# EAGLE board LSM6DS3_Breakout_Panel_v10 (EAGLE 7.3.0), part 1 of 3
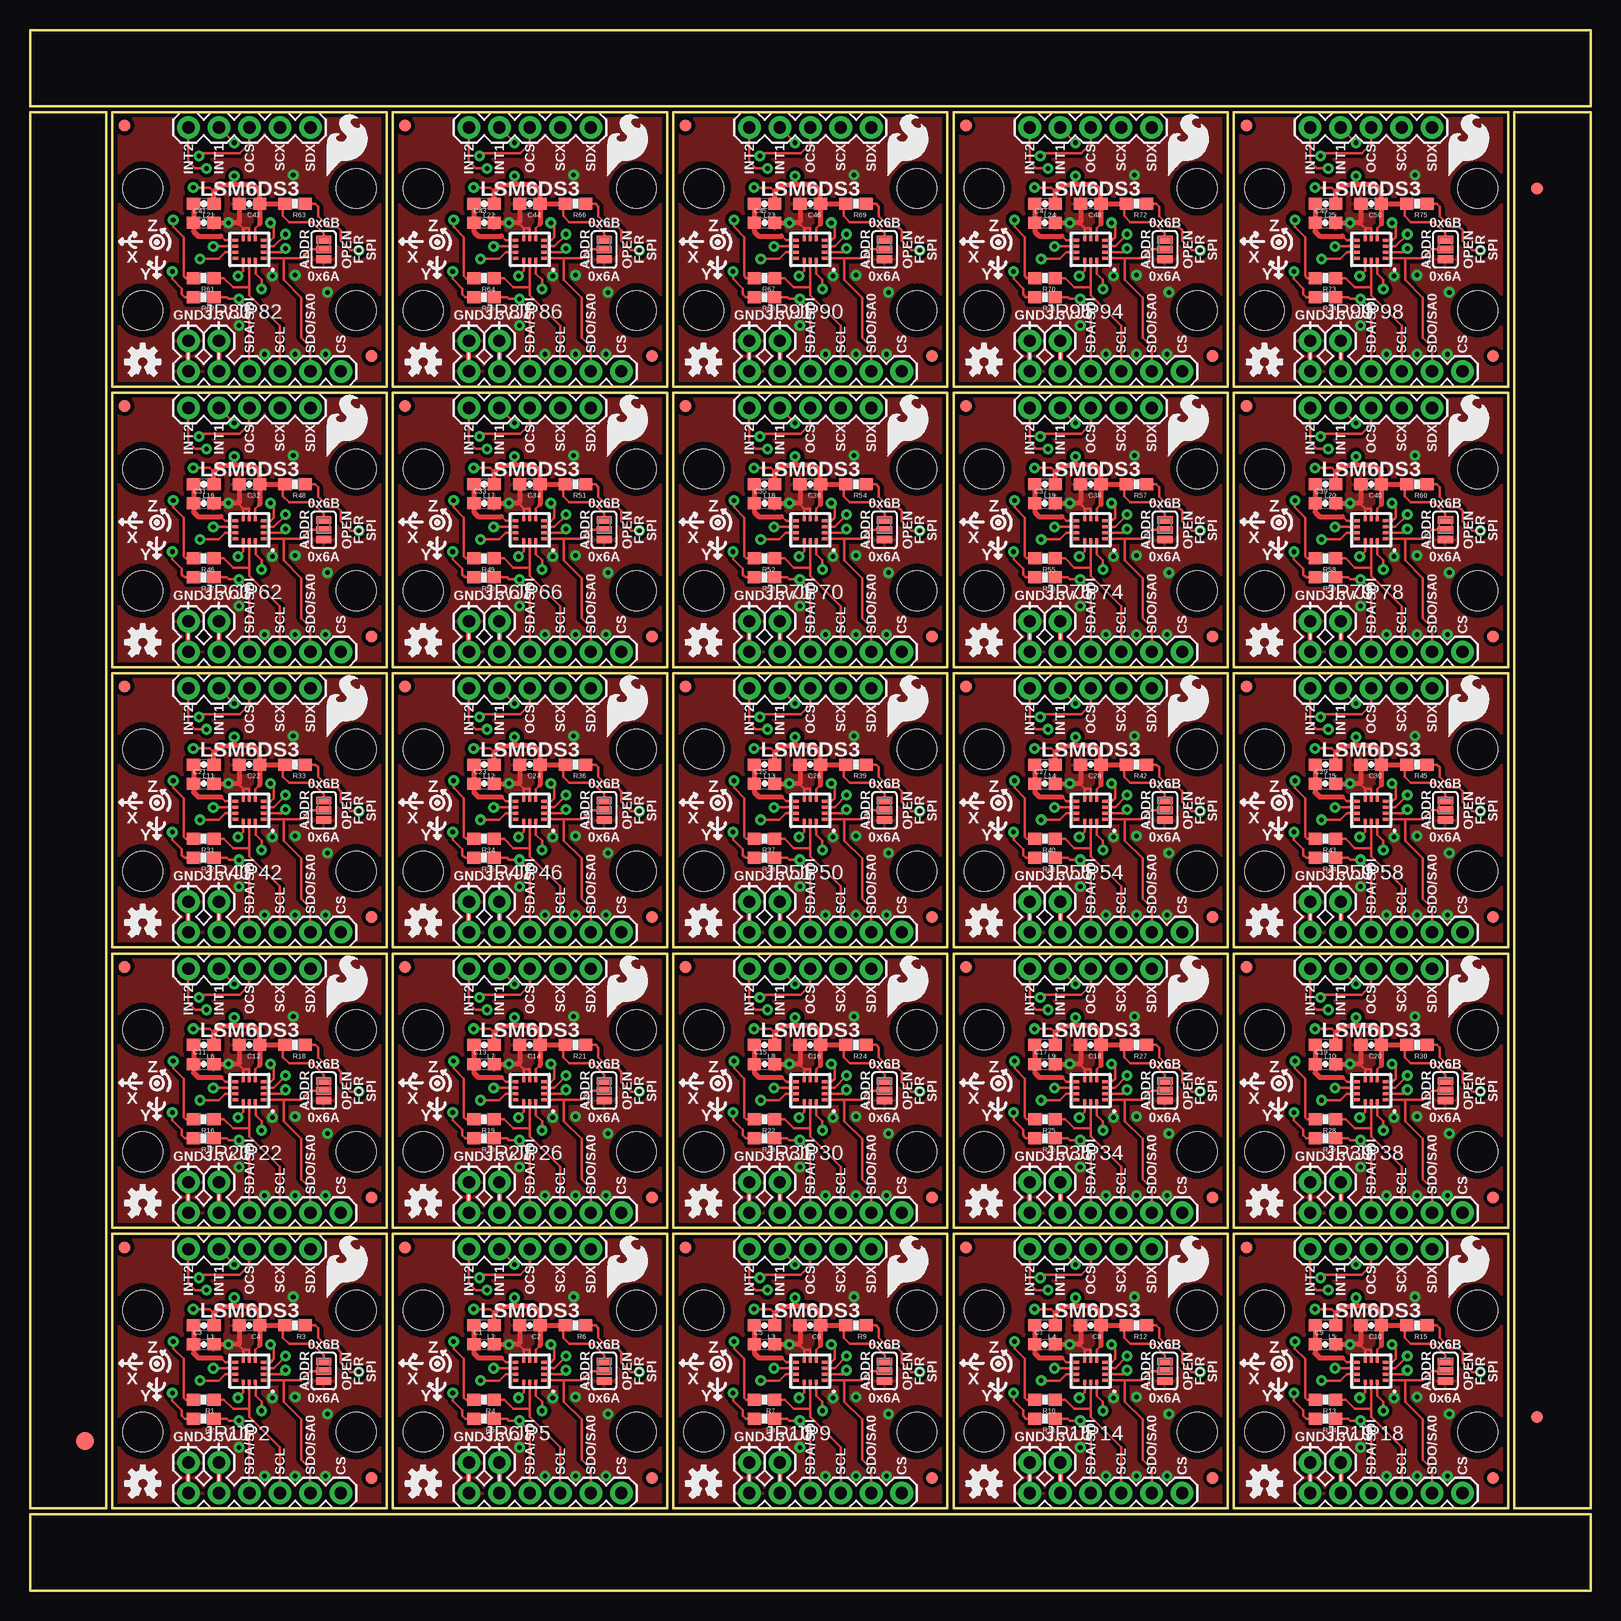
[diagram p0: board, top side]
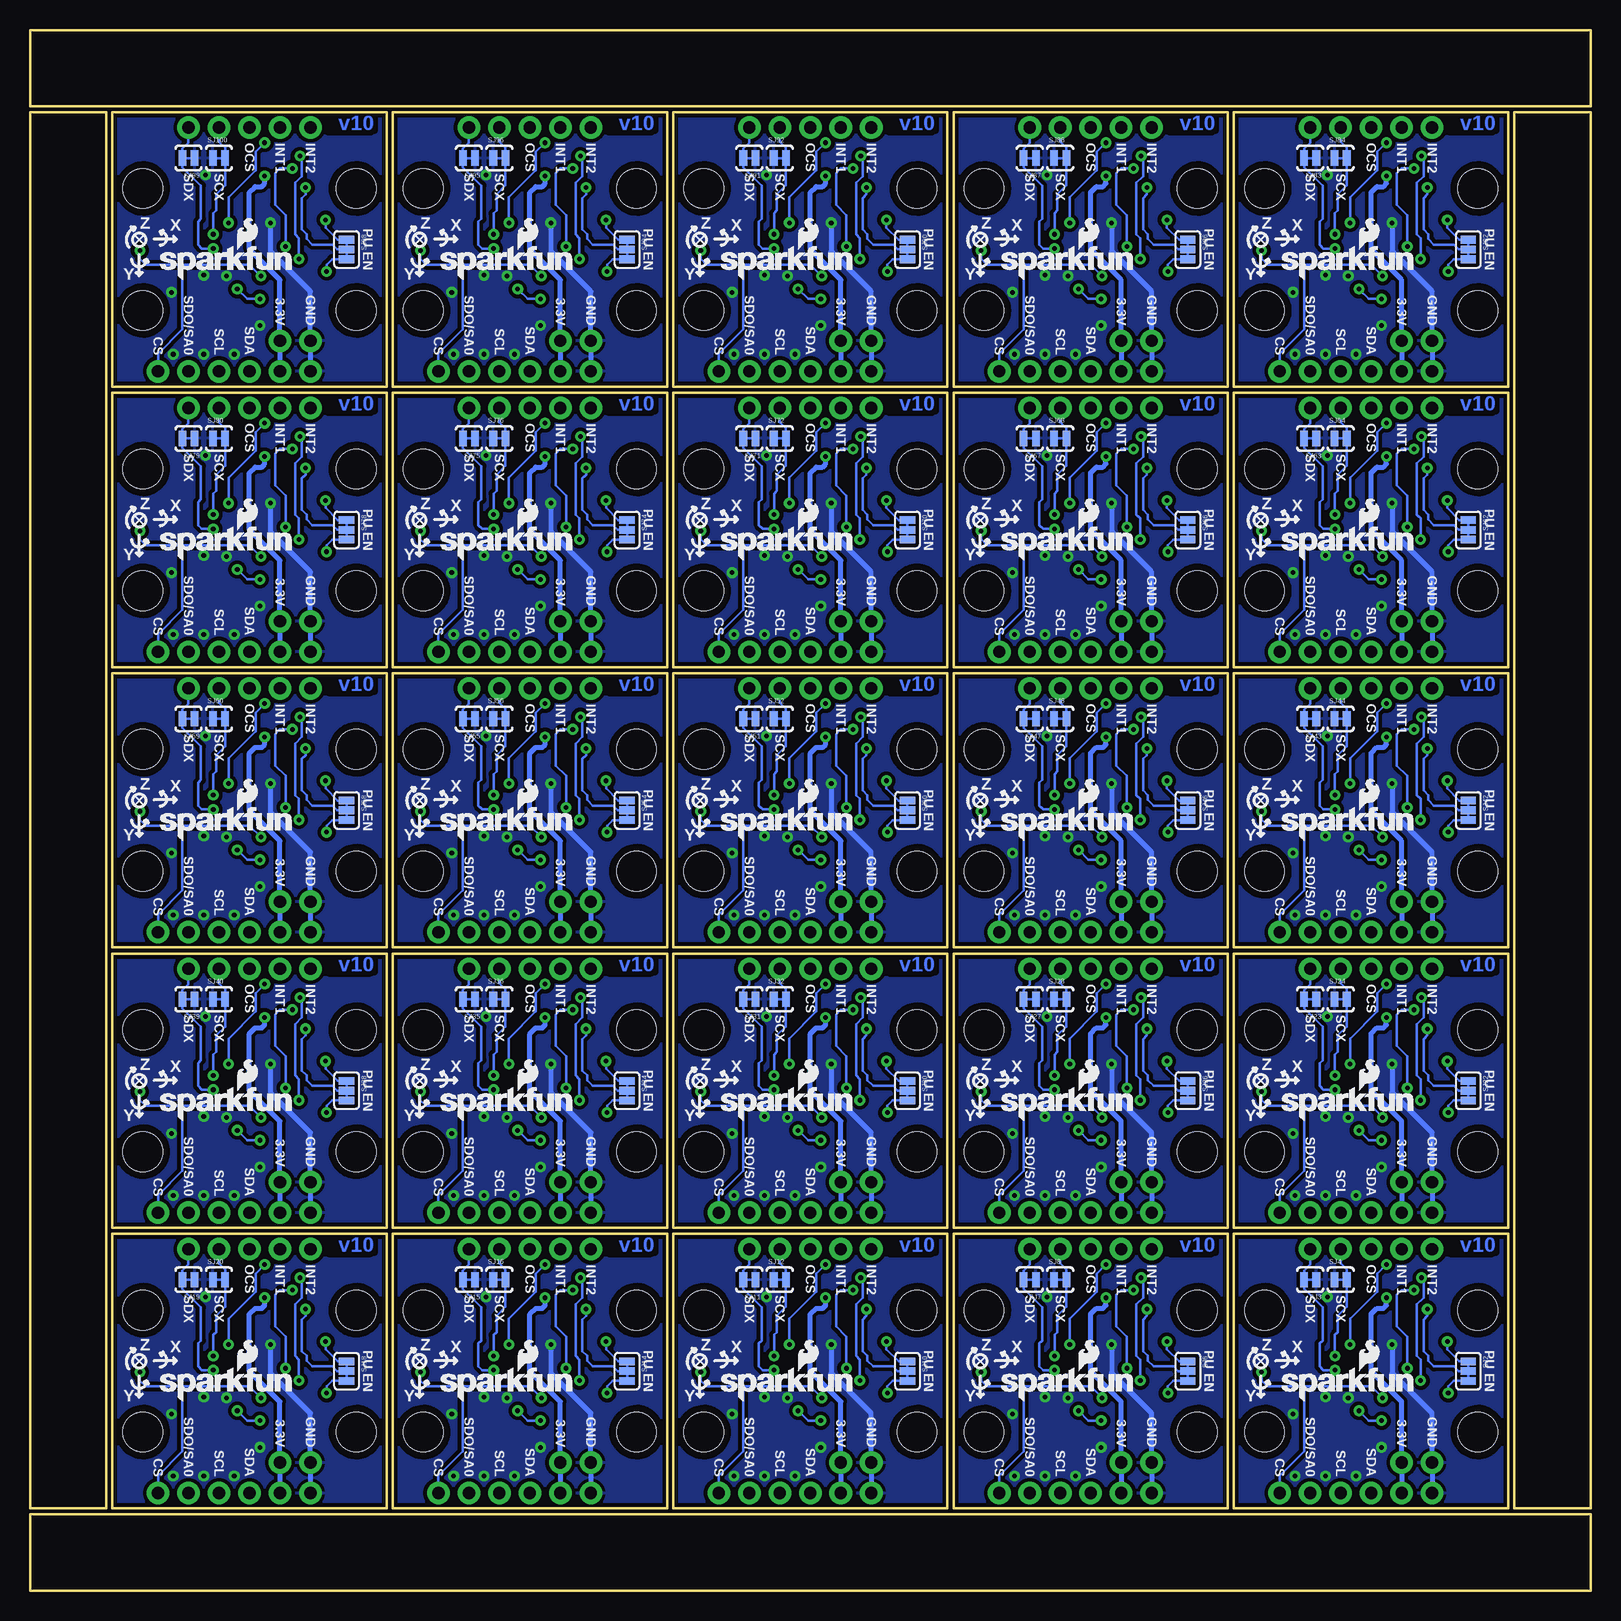
[diagram p1: board, bottom side, seen from below]

Size 130.05 x 130.05 mm. Coordinates in mm from the lower left corner, seen from the top.
Outline: 29.72,29.72 6.86,29.72 6.86,6.86 29.72,6.86 29.72,29.72
Outline: 53.09,29.72 30.23,29.72 30.23,6.86 53.09,6.86 53.09,29.72
Outline: 76.45,29.72 53.59,29.72 53.59,6.86 76.45,6.86 76.45,29.72
Outline: 99.82,29.72 76.96,29.72 76.96,6.86 99.82,6.86 99.82,29.72
Outline: 123.19,29.72 100.33,29.72 100.33,6.86 123.19,6.86 123.19,29.72
Outline: 29.72,53.09 6.86,53.09 6.86,30.23 29.72,30.23 29.72,53.09
Outline: 53.09,53.09 30.23,53.09 30.23,30.23 53.09,30.23 53.09,53.09
Outline: 76.45,53.09 53.59,53.09 53.59,30.23 76.45,30.23 76.45,53.09
Outline: 99.82,53.09 76.96,53.09 76.96,30.23 99.82,30.23 99.82,53.09
Outline: 123.19,53.09 100.33,53.09 100.33,30.23 123.19,30.23 123.19,53.09
Outline: 29.72,76.45 6.86,76.45 6.86,53.59 29.72,53.59 29.72,76.45
Outline: 53.09,76.45 30.23,76.45 30.23,53.59 53.09,53.59 53.09,76.45
Outline: 76.45,76.45 53.59,76.45 53.59,53.59 76.45,53.59 76.45,76.45
Outline: 99.82,76.45 76.96,76.45 76.96,53.59 99.82,53.59 99.82,76.45
Outline: 123.19,76.45 100.33,76.45 100.33,53.59 123.19,53.59 123.19,76.45
Outline: 29.72,99.82 6.86,99.82 6.86,76.96 29.72,76.96 29.72,99.82
Outline: 53.09,99.82 30.23,99.82 30.23,76.96 53.09,76.96 53.09,99.82
Outline: 76.45,99.82 53.59,99.82 53.59,76.96 76.45,76.96 76.45,99.82
Outline: 99.82,99.82 76.96,99.82 76.96,76.96 99.82,76.96 99.82,99.82
Outline: 123.19,99.82 100.33,99.82 100.33,76.96 123.19,76.96 123.19,99.82
Outline: 29.72,123.19 6.86,123.19 6.86,100.33 29.72,100.33 29.72,123.19
Outline: 53.09,123.19 30.23,123.19 30.23,100.33 53.09,100.33 53.09,123.19
Outline: 76.45,123.19 53.59,123.19 53.59,100.33 76.45,100.33 76.45,123.19
Outline: 99.82,123.19 76.96,123.19 76.96,100.33 99.82,100.33 99.82,123.19
Outline: 123.19,123.19 100.33,123.19 100.33,100.33 123.19,100.33 123.19,123.19
Outline: 6.35,6.86 6.35,123.19 0,123.19 0,6.86 6.35,6.86
Outline: 0,0 130.05,0 130.05,6.35 0,6.35 0,0
Outline: 0,123.7 130.05,123.7 130.05,130.05 0,130.05 0,123.7
Outline: 123.7,123.19 123.7,6.86 130.05,6.86 130.05,123.19 123.7,123.19
Copper layers (1*16): Top 0.035mm / dielectric 1.5mm / Bottom 0.035mm
Design rules "SparkFun-2-layer": minimum track width 7mil, minimum drill 15mil, track to track 8mil, track to pad 8mil, pad to pad 8mil, via to via 8mil, smd to smd 8mil, copper to edge 8mil, drill to drill 8mil, minimum pad ring 12mil, minimum via ring 10mil, stop-mask expansion 4mil, vias tented up to drill 20mil, thermal gap 10mil
bRestrict: 100 lines

## Footprints (pad centres in the part's own frame; a part is rotated, then mirrored left to right if it is on the bottom)
0603-CAP = smd 1.1 x 1: 1 -0.85,0; 2 0.85,0
FIDUCIAL-1.5X3 = smd 1.5 x 1.5: 1 0,0
FIDUCIAL-1X2 = smd 1 x 1: 1 0,0
1X06_NO_SILK_YES_STOP = drill 1.016 pad 1.88: 1 0,0; 2 2.54,0; 3 5.08,0; 4 7.62,0; 5 10.16,0; 6 12.7,0
1X01_NO_SILK = drill 1.016 pad 1.88: 1 0,0
1X05 = drill 1.016 pad 1.88: 1 0,0; 2 2.54,0; 3 5.08,0; 4 7.62,0; 5 10.16,0
0603 = smd 1.1 x 1: 1 -0.85,0; 2 0.85,0
0603-RES = smd 1.1 x 1: 1 -0.85,0; 2 0.85,0
PAD-JUMPER-3-2OF3_NC_BY_PASTE_YES_SILK_FULL_BOX = smd 0.635 x 1.27: 1 -0.813,0; 2 0,0; 3 0.813,0
PAD-JUMPER-3-3OF3_NC_BY_TRACE_YES_SILK_FULL_BOX = smd 0.635 x 1.27: 1 -0.813,0; 2 0,0; 3 0.813,0
PAD-JUMPER-2-NC_BY_TRACE_YES_SILK = smd 0.635 x 1.27: 1 -0.508,0; 2 0.508,0
STAND-OFF = hole 3.302: 0,0
LGA14L_DOT_INDICATOR = smd 0.45 x 0.25: 1 -1.175,0.75; 2 -1.175,0.25; 3 -1.175,-0.25; 4 -1.175,-0.75; 8 1.175,-0.75; 9 1.175,-0.25; 10 1.175,0.25; 11 1.175,0.75 | smd 0.25 x 0.45: 5 -0.5,-0.925; 6 0,-0.925; 7 0.5,-0.925; 12 0.5,0.925; 13 0,0.925; 14 -0.5,0.925

## Placement (x,y rotation side)
C1  0.1uF  [0603-CAP]  37.85,20.51 0 top
C2  0.1uF  [0603-CAP]  41.66,22.1 180 top
C3  0.1uF  [0603-CAP]  14.48,20.51 0 top
C4  0.1uF  [0603-CAP]  18.29,22.1 180 top
C5  0.1uF  [0603-CAP]  61.21,20.51 0 top
C6  0.1uF  [0603-CAP]  65.02,22.1 180 top
C7  0.1uF  [0603-CAP]  84.58,20.51 0 top
C8  0.1uF  [0603-CAP]  88.39,22.1 180 top
C9  0.1uF  [0603-CAP]  107.95,20.51 0 top
C10  0.1uF  [0603-CAP]  111.76,22.1 180 top
C11  0.1uF  [0603-CAP]  14.48,43.88 0 top
C12  0.1uF  [0603-CAP]  18.29,45.47 180 top
C13  0.1uF  [0603-CAP]  37.85,43.88 0 top
C14  0.1uF  [0603-CAP]  41.66,45.47 180 top
C15  0.1uF  [0603-CAP]  61.21,43.88 0 top
C16  0.1uF  [0603-CAP]  65.02,45.47 180 top
C17  0.1uF  [0603-CAP]  84.58,43.88 0 top
C18  0.1uF  [0603-CAP]  88.39,45.47 180 top
C19  0.1uF  [0603-CAP]  107.95,43.88 0 top
C20  0.1uF  [0603-CAP]  111.76,45.47 180 top
C21  0.1uF  [0603-CAP]  14.48,67.25 0 top
C22  0.1uF  [0603-CAP]  18.29,68.83 180 top
C23  0.1uF  [0603-CAP]  37.85,67.25 0 top
C24  0.1uF  [0603-CAP]  41.66,68.83 180 top
C25  0.1uF  [0603-CAP]  61.21,67.25 0 top
C26  0.1uF  [0603-CAP]  65.02,68.83 180 top
C27  0.1uF  [0603-CAP]  84.58,67.25 0 top
C28  0.1uF  [0603-CAP]  88.39,68.83 180 top
C29  0.1uF  [0603-CAP]  107.95,67.25 0 top
C30  0.1uF  [0603-CAP]  111.76,68.83 180 top
C31  0.1uF  [0603-CAP]  14.48,90.61 0 top
C32  0.1uF  [0603-CAP]  18.29,92.2 180 top
C33  0.1uF  [0603-CAP]  37.85,90.61 0 top
C34  0.1uF  [0603-CAP]  41.66,92.2 180 top
C35  0.1uF  [0603-CAP]  61.21,90.61 0 top
C36  0.1uF  [0603-CAP]  65.02,92.2 180 top
C37  0.1uF  [0603-CAP]  84.58,90.61 0 top
C38  0.1uF  [0603-CAP]  88.39,92.2 180 top
C39  0.1uF  [0603-CAP]  107.95,90.61 0 top
C40  0.1uF  [0603-CAP]  111.76,92.2 180 top
C41  0.1uF  [0603-CAP]  14.48,113.98 0 top
C42  0.1uF  [0603-CAP]  18.29,115.57 180 top
C43  0.1uF  [0603-CAP]  37.85,113.98 0 top
C44  0.1uF  [0603-CAP]  41.66,115.57 180 top
C45  0.1uF  [0603-CAP]  61.21,113.98 0 top
C46  0.1uF  [0603-CAP]  65.02,115.57 180 top
C47  0.1uF  [0603-CAP]  84.58,113.98 0 top
C48  0.1uF  [0603-CAP]  88.39,115.57 180 top
C49  0.1uF  [0603-CAP]  107.95,113.98 0 top
C50  0.1uF  [0603-CAP]  111.76,115.57 180 top
E$1  [FIDUCIAL-1.5X3]  4.57,12.45 0 top
E$6  [FIDUCIAL-1X2]  125.6,116.84 180 top
E$7  [FIDUCIAL-1X2]  125.6,14.48 0 top
FID1  FIDUCIAL1X2  [FIDUCIAL-1X2]  7.89,28.61 0 top
FID2  FIDUCIAL1X2  [FIDUCIAL-1X2]  28.45,9.4 0 top
FID3  FIDUCIAL1X2  [FIDUCIAL-1X2]  31.26,28.61 0 top
FID4  FIDUCIAL1X2  [FIDUCIAL-1X2]  51.82,9.4 0 top
FID5  FIDUCIAL1X2  [FIDUCIAL-1X2]  54.63,28.61 0 top
FID6  FIDUCIAL1X2  [FIDUCIAL-1X2]  75.18,9.4 0 top
FID7  FIDUCIAL1X2  [FIDUCIAL-1X2]  77.99,28.61 0 top
FID8  FIDUCIAL1X2  [FIDUCIAL-1X2]  98.55,9.4 0 top
FID9  FIDUCIAL1X2  [FIDUCIAL-1X2]  101.36,28.61 0 top
FID10  FIDUCIAL1X2  [FIDUCIAL-1X2]  121.92,9.4 0 top
FID11  FIDUCIAL1X2  [FIDUCIAL-1X2]  7.89,51.97 0 top
FID12  FIDUCIAL1X2  [FIDUCIAL-1X2]  28.45,32.77 0 top
FID13  FIDUCIAL1X2  [FIDUCIAL-1X2]  31.26,51.97 0 top
FID14  FIDUCIAL1X2  [FIDUCIAL-1X2]  51.82,32.77 0 top
FID15  FIDUCIAL1X2  [FIDUCIAL-1X2]  54.63,51.97 0 top
FID16  FIDUCIAL1X2  [FIDUCIAL-1X2]  75.18,32.77 0 top
FID17  FIDUCIAL1X2  [FIDUCIAL-1X2]  77.99,51.97 0 top
FID18  FIDUCIAL1X2  [FIDUCIAL-1X2]  98.55,32.77 0 top
FID19  FIDUCIAL1X2  [FIDUCIAL-1X2]  101.36,51.97 0 top
FID20  FIDUCIAL1X2  [FIDUCIAL-1X2]  121.92,32.77 0 top
FID21  FIDUCIAL1X2  [FIDUCIAL-1X2]  7.89,75.34 0 top
FID22  FIDUCIAL1X2  [FIDUCIAL-1X2]  28.45,56.13 0 top
FID23  FIDUCIAL1X2  [FIDUCIAL-1X2]  31.26,75.34 0 top
FID24  FIDUCIAL1X2  [FIDUCIAL-1X2]  51.82,56.13 0 top
FID25  FIDUCIAL1X2  [FIDUCIAL-1X2]  54.63,75.34 0 top
FID26  FIDUCIAL1X2  [FIDUCIAL-1X2]  75.18,56.13 0 top
FID27  FIDUCIAL1X2  [FIDUCIAL-1X2]  77.99,75.34 0 top
FID28  FIDUCIAL1X2  [FIDUCIAL-1X2]  98.55,56.13 0 top
FID29  FIDUCIAL1X2  [FIDUCIAL-1X2]  101.36,75.34 0 top
FID30  FIDUCIAL1X2  [FIDUCIAL-1X2]  121.92,56.13 0 top
FID31  FIDUCIAL1X2  [FIDUCIAL-1X2]  7.89,98.71 0 top
FID32  FIDUCIAL1X2  [FIDUCIAL-1X2]  28.45,79.5 0 top
FID33  FIDUCIAL1X2  [FIDUCIAL-1X2]  31.26,98.71 0 top
FID34  FIDUCIAL1X2  [FIDUCIAL-1X2]  51.82,79.5 0 top
FID35  FIDUCIAL1X2  [FIDUCIAL-1X2]  54.63,98.71 0 top
FID36  FIDUCIAL1X2  [FIDUCIAL-1X2]  75.18,79.5 0 top
FID37  FIDUCIAL1X2  [FIDUCIAL-1X2]  77.99,98.71 0 top
FID38  FIDUCIAL1X2  [FIDUCIAL-1X2]  98.55,79.5 0 top
FID39  FIDUCIAL1X2  [FIDUCIAL-1X2]  101.36,98.71 0 top
FID40  FIDUCIAL1X2  [FIDUCIAL-1X2]  121.92,79.5 0 top
FID41  FIDUCIAL1X2  [FIDUCIAL-1X2]  7.89,122.08 0 top
FID42  FIDUCIAL1X2  [FIDUCIAL-1X2]  28.45,102.87 0 top
FID43  FIDUCIAL1X2  [FIDUCIAL-1X2]  31.26,122.08 0 top
FID44  FIDUCIAL1X2  [FIDUCIAL-1X2]  51.82,102.87 0 top
FID45  FIDUCIAL1X2  [FIDUCIAL-1X2]  54.63,122.08 0 top
FID46  FIDUCIAL1X2  [FIDUCIAL-1X2]  75.18,102.87 0 top
FID47  FIDUCIAL1X2  [FIDUCIAL-1X2]  77.99,122.08 0 top
FID48  FIDUCIAL1X2  [FIDUCIAL-1X2]  98.55,102.87 0 top
FID49  FIDUCIAL1X2  [FIDUCIAL-1X2]  101.36,122.08 0 top
FID50  FIDUCIAL1X2  [FIDUCIAL-1X2]  121.92,102.87 0 top
JP1  IO  [1X06_NO_SILK_YES_STOP]  25.91,8.13 180 top
JP2  3.3V  [1X01_NO_SILK]  15.75,10.67 0 top
JP3  IO  [1X05]  13.21,28.45 0 top
JP4  IO  [1X06_NO_SILK_YES_STOP]  49.28,8.13 180 top
JP5  3.3V  [1X01_NO_SILK]  39.12,10.67 0 top
JP6  GND  [1X01_NO_SILK]  36.58,10.67 0 top
JP7  IO  [1X05]  36.58,28.45 0 top
JP8  IO  [1X06_NO_SILK_YES_STOP]  72.64,8.13 180 top
JP9  3.3V  [1X01_NO_SILK]  62.48,10.67 0 top
JP10  GND  [1X01_NO_SILK]  59.94,10.67 0 top
JP11  GND  [1X01_NO_SILK]  13.21,10.67 0 top
JP12  IO  [1X05]  59.94,28.45 0 top
JP13  IO  [1X06_NO_SILK_YES_STOP]  96.01,8.13 180 top
JP14  3.3V  [1X01_NO_SILK]  85.85,10.67 0 top
JP15  GND  [1X01_NO_SILK]  83.31,10.67 0 top
JP16  IO  [1X05]  83.31,28.45 0 top
JP17  IO  [1X06_NO_SILK_YES_STOP]  119.38,8.13 180 top
JP18  3.3V  [1X01_NO_SILK]  109.22,10.67 0 top
JP19  GND  [1X01_NO_SILK]  106.68,10.67 0 top
JP20  IO  [1X05]  106.68,28.45 0 top
JP21  IO  [1X06_NO_SILK_YES_STOP]  25.91,31.5 180 top
JP22  3.3V  [1X01_NO_SILK]  15.75,34.04 0 top
JP23  GND  [1X01_NO_SILK]  13.21,34.04 0 top
JP24  IO  [1X05]  13.21,51.82 0 top
JP25  IO  [1X06_NO_SILK_YES_STOP]  49.28,31.5 180 top
JP26  3.3V  [1X01_NO_SILK]  39.12,34.04 0 top
JP27  GND  [1X01_NO_SILK]  36.58,34.04 0 top
JP28  IO  [1X05]  36.58,51.82 0 top
JP29  IO  [1X06_NO_SILK_YES_STOP]  72.64,31.5 180 top
JP30  3.3V  [1X01_NO_SILK]  62.48,34.04 0 top
JP31  GND  [1X01_NO_SILK]  59.94,34.04 0 top
JP32  IO  [1X05]  59.94,51.82 0 top
JP33  IO  [1X06_NO_SILK_YES_STOP]  96.01,31.5 180 top
JP34  3.3V  [1X01_NO_SILK]  85.85,34.04 0 top
JP35  GND  [1X01_NO_SILK]  83.31,34.04 0 top
JP36  IO  [1X05]  83.31,51.82 0 top
JP37  IO  [1X06_NO_SILK_YES_STOP]  119.38,31.5 180 top
JP38  3.3V  [1X01_NO_SILK]  109.22,34.04 0 top
JP39  GND  [1X01_NO_SILK]  106.68,34.04 0 top
JP40  IO  [1X05]  106.68,51.82 0 top
JP41  IO  [1X06_NO_SILK_YES_STOP]  25.91,54.86 180 top
JP42  3.3V  [1X01_NO_SILK]  15.75,57.4 0 top
JP43  GND  [1X01_NO_SILK]  13.21,57.4 0 top
JP44  IO  [1X05]  13.21,75.18 0 top
JP45  IO  [1X06_NO_SILK_YES_STOP]  49.28,54.86 180 top
JP46  3.3V  [1X01_NO_SILK]  39.12,57.4 0 top
JP47  GND  [1X01_NO_SILK]  36.58,57.4 0 top
JP48  IO  [1X05]  36.58,75.18 0 top
JP49  IO  [1X06_NO_SILK_YES_STOP]  72.64,54.86 180 top
JP50  3.3V  [1X01_NO_SILK]  62.48,57.4 0 top
JP51  GND  [1X01_NO_SILK]  59.94,57.4 0 top
JP52  IO  [1X05]  59.94,75.18 0 top
JP53  IO  [1X06_NO_SILK_YES_STOP]  96.01,54.86 180 top
JP54  3.3V  [1X01_NO_SILK]  85.85,57.4 0 top
JP55  GND  [1X01_NO_SILK]  83.31,57.4 0 top
JP56  IO  [1X05]  83.31,75.18 0 top
JP57  IO  [1X06_NO_SILK_YES_STOP]  119.38,54.86 180 top
JP58  3.3V  [1X01_NO_SILK]  109.22,57.4 0 top
JP59  GND  [1X01_NO_SILK]  106.68,57.4 0 top
JP60  IO  [1X05]  106.68,75.18 0 top
JP61  IO  [1X06_NO_SILK_YES_STOP]  25.91,78.23 180 top
JP62  3.3V  [1X01_NO_SILK]  15.75,80.77 0 top
JP63  GND  [1X01_NO_SILK]  13.21,80.77 0 top
JP64  IO  [1X05]  13.21,98.55 0 top
JP65  IO  [1X06_NO_SILK_YES_STOP]  49.28,78.23 180 top
JP66  3.3V  [1X01_NO_SILK]  39.12,80.77 0 top
JP67  GND  [1X01_NO_SILK]  36.58,80.77 0 top
JP68  IO  [1X05]  36.58,98.55 0 top
JP69  IO  [1X06_NO_SILK_YES_STOP]  72.64,78.23 180 top
JP70  3.3V  [1X01_NO_SILK]  62.48,80.77 0 top
JP71  GND  [1X01_NO_SILK]  59.94,80.77 0 top
JP72  IO  [1X05]  59.94,98.55 0 top
JP73  IO  [1X06_NO_SILK_YES_STOP]  96.01,78.23 180 top
JP74  3.3V  [1X01_NO_SILK]  85.85,80.77 0 top
JP75  GND  [1X01_NO_SILK]  83.31,80.77 0 top
JP76  IO  [1X05]  83.31,98.55 0 top
JP77  IO  [1X06_NO_SILK_YES_STOP]  119.38,78.23 180 top
JP78  3.3V  [1X01_NO_SILK]  109.22,80.77 0 top
JP79  GND  [1X01_NO_SILK]  106.68,80.77 0 top
JP80  IO  [1X05]  106.68,98.55 0 top
JP81  IO  [1X06_NO_SILK_YES_STOP]  25.91,101.6 180 top
JP82  3.3V  [1X01_NO_SILK]  15.75,104.14 0 top
JP83  GND  [1X01_NO_SILK]  13.21,104.14 0 top
JP84  IO  [1X05]  13.21,121.92 0 top
JP85  IO  [1X06_NO_SILK_YES_STOP]  49.28,101.6 180 top
JP86  3.3V  [1X01_NO_SILK]  39.12,104.14 0 top
JP87  GND  [1X01_NO_SILK]  36.58,104.14 0 top
JP88  IO  [1X05]  36.58,121.92 0 top
JP89  IO  [1X06_NO_SILK_YES_STOP]  72.64,101.6 180 top
JP90  3.3V  [1X01_NO_SILK]  62.48,104.14 0 top
JP91  GND  [1X01_NO_SILK]  59.94,104.14 0 top
JP92  IO  [1X05]  59.94,121.92 0 top
JP93  IO  [1X06_NO_SILK_YES_STOP]  96.01,101.6 180 top
JP94  3.3V  [1X01_NO_SILK]  85.85,104.14 0 top
JP95  GND  [1X01_NO_SILK]  83.31,104.14 0 top
JP96  IO  [1X05]  83.31,121.92 0 top
JP97  IO  [1X06_NO_SILK_YES_STOP]  119.38,101.6 180 top
JP98  3.3V  [1X01_NO_SILK]  109.22,104.14 0 top
JP99  GND  [1X01_NO_SILK]  106.68,104.14 0 top
JP100  IO  [1X05]  106.68,121.92 0 top
L1  RES-07859  [0603]  14.48,22.1 180 top
L2  RES-07859  [0603]  37.85,22.1 180 top
L3  RES-07859  [0603]  61.21,22.1 180 top
L4  RES-07859  [0603]  84.58,22.1 180 top
L5  RES-07859  [0603]  107.95,22.1 180 top
L6  RES-07859  [0603]  14.48,45.47 180 top
L7  RES-07859  [0603]  37.85,45.47 180 top
L8  RES-07859  [0603]  61.21,45.47 180 top
L9  RES-07859  [0603]  84.58,45.47 180 top
L10  RES-07859  [0603]  107.95,45.47 180 top
L11  RES-07859  [0603]  14.48,68.83 180 top
L12  RES-07859  [0603]  37.85,68.83 180 top
L13  RES-07859  [0603]  61.21,68.83 180 top
L14  RES-07859  [0603]  84.58,68.83 180 top
L15  RES-07859  [0603]  107.95,68.83 180 top
L16  RES-07859  [0603]  14.48,92.2 180 top
L17  RES-07859  [0603]  37.85,92.2 180 top
L18  RES-07859  [0603]  61.21,92.2 180 top
L19  RES-07859  [0603]  84.58,92.2 180 top
L20  RES-07859  [0603]  107.95,92.2 180 top
L21  RES-07859  [0603]  14.48,115.57 180 top
L22  RES-07859  [0603]  37.85,115.57 180 top
L23  RES-07859  [0603]  61.21,115.57 180 top
L24  RES-07859  [0603]  84.58,115.57 180 top
L25  RES-07859  [0603]  107.95,115.57 180 top
LOGO1  SFE_LOGO_FLAME.2_INCH  [SFE_LOGO_FLAME_.2]  24.4,24.16 0 top
LOGO2  OSHW-LOGOS  [OSHW-LOGO-S]  9.4,8.92 0 top
LOGO3  SFE_LOGO_NAME_FLAME.1_INCH  [SFE_LOGO_NAME_FLAME_.1]  26.15,15.67 0 bottom
LOGO4  SFE_LOGO_FLAME.2_INCH  [SFE_LOGO_FLAME_.2]  47.77,24.16 0 top
LOGO5  OSHW-LOGOS  [OSHW-LOGO-S]  32.77,8.92 0 top
LOGO6  SFE_LOGO_NAME_FLAME.1_INCH  [SFE_LOGO_NAME_FLAME_.1]  49.51,15.67 0 bottom
LOGO7  SFE_LOGO_FLAME.2_INCH  [SFE_LOGO_FLAME_.2]  71.14,24.16 0 top
LOGO8  OSHW-LOGOS  [OSHW-LOGO-S]  56.13,8.92 0 top
LOGO9  SFE_LOGO_NAME_FLAME.1_INCH  [SFE_LOGO_NAME_FLAME_.1]  72.88,15.67 0 bottom
LOGO10  SFE_LOGO_FLAME.2_INCH  [SFE_LOGO_FLAME_.2]  94.5,24.16 0 top
LOGO11  OSHW-LOGOS  [OSHW-LOGO-S]  79.5,8.92 0 top
LOGO12  SFE_LOGO_NAME_FLAME.1_INCH  [SFE_LOGO_NAME_FLAME_.1]  96.25,15.67 0 bottom
LOGO13  SFE_LOGO_FLAME.2_INCH  [SFE_LOGO_FLAME_.2]  117.87,24.16 0 top
LOGO14  OSHW-LOGOS  [OSHW-LOGO-S]  102.87,8.92 0 top
LOGO15  SFE_LOGO_NAME_FLAME.1_INCH  [SFE_LOGO_NAME_FLAME_.1]  119.62,15.67 0 bottom
LOGO16  SFE_LOGO_FLAME.2_INCH  [SFE_LOGO_FLAME_.2]  24.4,47.53 0 top
LOGO17  OSHW-LOGOS  [OSHW-LOGO-S]  9.4,32.29 0 top
LOGO18  SFE_LOGO_NAME_FLAME.1_INCH  [SFE_LOGO_NAME_FLAME_.1]  26.15,39.04 0 bottom
LOGO19  SFE_LOGO_FLAME.2_INCH  [SFE_LOGO_FLAME_.2]  47.77,47.53 0 top
LOGO20  OSHW-LOGOS  [OSHW-LOGO-S]  32.77,32.29 0 top
LOGO21  SFE_LOGO_NAME_FLAME.1_INCH  [SFE_LOGO_NAME_FLAME_.1]  49.51,39.04 0 bottom
LOGO22  SFE_LOGO_FLAME.2_INCH  [SFE_LOGO_FLAME_.2]  71.14,47.53 0 top
LOGO23  OSHW-LOGOS  [OSHW-LOGO-S]  56.13,32.29 0 top
LOGO24  SFE_LOGO_NAME_FLAME.1_INCH  [SFE_LOGO_NAME_FLAME_.1]  72.88,39.04 0 bottom
LOGO25  SFE_LOGO_FLAME.2_INCH  [SFE_LOGO_FLAME_.2]  94.5,47.53 0 top
LOGO26  OSHW-LOGOS  [OSHW-LOGO-S]  79.5,32.29 0 top
LOGO27  SFE_LOGO_NAME_FLAME.1_INCH  [SFE_LOGO_NAME_FLAME_.1]  96.25,39.04 0 bottom
LOGO28  SFE_LOGO_FLAME.2_INCH  [SFE_LOGO_FLAME_.2]  117.87,47.53 0 top
LOGO29  OSHW-LOGOS  [OSHW-LOGO-S]  102.87,32.29 0 top
LOGO30  SFE_LOGO_NAME_FLAME.1_INCH  [SFE_LOGO_NAME_FLAME_.1]  119.62,39.04 0 bottom
LOGO31  SFE_LOGO_FLAME.2_INCH  [SFE_LOGO_FLAME_.2]  24.4,70.9 0 top
LOGO32  OSHW-LOGOS  [OSHW-LOGO-S]  9.4,55.66 0 top
LOGO33  SFE_LOGO_NAME_FLAME.1_INCH  [SFE_LOGO_NAME_FLAME_.1]  26.15,62.4 0 bottom
LOGO34  SFE_LOGO_FLAME.2_INCH  [SFE_LOGO_FLAME_.2]  47.77,70.9 0 top
LOGO35  OSHW-LOGOS  [OSHW-LOGO-S]  32.77,55.66 0 top
LOGO36  SFE_LOGO_NAME_FLAME.1_INCH  [SFE_LOGO_NAME_FLAME_.1]  49.51,62.4 0 bottom
LOGO37  SFE_LOGO_FLAME.2_INCH  [SFE_LOGO_FLAME_.2]  71.14,70.9 0 top
LOGO38  OSHW-LOGOS  [OSHW-LOGO-S]  56.13,55.66 0 top
LOGO39  SFE_LOGO_NAME_FLAME.1_INCH  [SFE_LOGO_NAME_FLAME_.1]  72.88,62.4 0 bottom
LOGO40  SFE_LOGO_FLAME.2_INCH  [SFE_LOGO_FLAME_.2]  94.5,70.9 0 top
LOGO41  OSHW-LOGOS  [OSHW-LOGO-S]  79.5,55.66 0 top
LOGO42  SFE_LOGO_NAME_FLAME.1_INCH  [SFE_LOGO_NAME_FLAME_.1]  96.25,62.4 0 bottom
LOGO43  SFE_LOGO_FLAME.2_INCH  [SFE_LOGO_FLAME_.2]  117.87,70.9 0 top
LOGO44  OSHW-LOGOS  [OSHW-LOGO-S]  102.87,55.66 0 top
LOGO45  SFE_LOGO_NAME_FLAME.1_INCH  [SFE_LOGO_NAME_FLAME_.1]  119.62,62.4 0 bottom
LOGO46  SFE_LOGO_FLAME.2_INCH  [SFE_LOGO_FLAME_.2]  24.4,94.27 0 top
LOGO47  OSHW-LOGOS  [OSHW-LOGO-S]  9.4,79.03 0 top
LOGO48  SFE_LOGO_NAME_FLAME.1_INCH  [SFE_LOGO_NAME_FLAME_.1]  26.15,85.77 0 bottom
LOGO49  SFE_LOGO_FLAME.2_INCH  [SFE_LOGO_FLAME_.2]  47.77,94.27 0 top
LOGO50  OSHW-LOGOS  [OSHW-LOGO-S]  32.77,79.03 0 top
LOGO51  SFE_LOGO_NAME_FLAME.1_INCH  [SFE_LOGO_NAME_FLAME_.1]  49.51,85.77 0 bottom
LOGO52  SFE_LOGO_FLAME.2_INCH  [SFE_LOGO_FLAME_.2]  71.14,94.27 0 top
LOGO53  OSHW-LOGOS  [OSHW-LOGO-S]  56.13,79.03 0 top
LOGO54  SFE_LOGO_NAME_FLAME.1_INCH  [SFE_LOGO_NAME_FLAME_.1]  72.88,85.77 0 bottom
LOGO55  SFE_LOGO_FLAME.2_INCH  [SFE_LOGO_FLAME_.2]  94.5,94.27 0 top
LOGO56  OSHW-LOGOS  [OSHW-LOGO-S]  79.5,79.03 0 top
LOGO57  SFE_LOGO_NAME_FLAME.1_INCH  [SFE_LOGO_NAME_FLAME_.1]  96.25,85.77 0 bottom
LOGO58  SFE_LOGO_FLAME.2_INCH  [SFE_LOGO_FLAME_.2]  117.87,94.27 0 top
LOGO59  OSHW-LOGOS  [OSHW-LOGO-S]  102.87,79.03 0 top
LOGO60  SFE_LOGO_NAME_FLAME.1_INCH  [SFE_LOGO_NAME_FLAME_.1]  119.62,85.77 0 bottom
LOGO61  SFE_LOGO_FLAME.2_INCH  [SFE_LOGO_FLAME_.2]  24.4,117.63 0 top
LOGO62  OSHW-LOGOS  [OSHW-LOGO-S]  9.4,102.39 0 top
LOGO63  SFE_LOGO_NAME_FLAME.1_INCH  [SFE_LOGO_NAME_FLAME_.1]  26.15,109.14 0 bottom
LOGO64  SFE_LOGO_FLAME.2_INCH  [SFE_LOGO_FLAME_.2]  47.77,117.63 0 top
LOGO65  OSHW-LOGOS  [OSHW-LOGO-S]  32.77,102.39 0 top
LOGO66  SFE_LOGO_NAME_FLAME.1_INCH  [SFE_LOGO_NAME_FLAME_.1]  49.51,109.14 0 bottom
LOGO67  SFE_LOGO_FLAME.2_INCH  [SFE_LOGO_FLAME_.2]  71.14,117.63 0 top
LOGO68  OSHW-LOGOS  [OSHW-LOGO-S]  56.13,102.39 0 top
LOGO69  SFE_LOGO_NAME_FLAME.1_INCH  [SFE_LOGO_NAME_FLAME_.1]  72.88,109.14 0 bottom
LOGO70  SFE_LOGO_FLAME.2_INCH  [SFE_LOGO_FLAME_.2]  94.5,117.63 0 top
LOGO71  OSHW-LOGOS  [OSHW-LOGO-S]  79.5,102.39 0 top
LOGO72  SFE_LOGO_NAME_FLAME.1_INCH  [SFE_LOGO_NAME_FLAME_.1]  96.25,109.14 0 bottom
LOGO73  SFE_LOGO_FLAME.2_INCH  [SFE_LOGO_FLAME_.2]  117.87,117.63 0 top
LOGO74  OSHW-LOGOS  [OSHW-LOGO-S]  102.87,102.39 0 top
LOGO75  SFE_LOGO_NAME_FLAME.1_INCH  [SFE_LOGO_NAME_FLAME_.1]  119.62,109.14 0 bottom
R1  4.7K  [0603-RES]  14.48,15.91 180 top
R2  4.7K  [0603-RES]  14.48,14.32 180 top
R3  10K  [0603-RES]  22.1,22.1 180 top
R4  4.7K  [0603-RES]  37.85,15.91 180 top
R5  4.7K  [0603-RES]  37.85,14.32 180 top
R6  10K  [0603-RES]  45.47,22.1 180 top
R7  4.7K  [0603-RES]  61.21,15.91 180 top
R8  4.7K  [0603-RES]  61.21,14.32 180 top
R9  10K  [0603-RES]  68.83,22.1 180 top
R10  4.7K  [0603-RES]  84.58,15.91 180 top
R11  4.7K  [0603-RES]  84.58,14.32 180 top
R12  10K  [0603-RES]  92.2,22.1 180 top
R13  4.7K  [0603-RES]  107.95,15.91 180 top
R14  4.7K  [0603-RES]  107.95,14.32 180 top
R15  10K  [0603-RES]  115.57,22.1 180 top
R16  4.7K  [0603-RES]  14.48,39.27 180 top
R17  4.7K  [0603-RES]  14.48,37.69 180 top
R18  10K  [0603-RES]  22.1,45.47 180 top
R19  4.7K  [0603-RES]  37.85,39.27 180 top
R20  4.7K  [0603-RES]  37.85,37.69 180 top
R21  10K  [0603-RES]  45.47,45.47 180 top
R22  4.7K  [0603-RES]  61.21,39.27 180 top
R23  4.7K  [0603-RES]  61.21,37.69 180 top
R24  10K  [0603-RES]  68.83,45.47 180 top
R25  4.7K  [0603-RES]  84.58,39.27 180 top
R26  4.7K  [0603-RES]  84.58,37.69 180 top
R27  10K  [0603-RES]  92.2,45.47 180 top
R28  4.7K  [0603-RES]  107.95,39.27 180 top
R29  4.7K  [0603-RES]  107.95,37.69 180 top
R30  10K  [0603-RES]  115.57,45.47 180 top
R31  4.7K  [0603-RES]  14.48,62.64 180 top
R32  4.7K  [0603-RES]  14.48,61.06 180 top
R33  10K  [0603-RES]  22.1,68.83 180 top
R34  4.7K  [0603-RES]  37.85,62.64 180 top
R35  4.7K  [0603-RES]  37.85,61.06 180 top
R36  10K  [0603-RES]  45.47,68.83 180 top
R37  4.7K  [0603-RES]  61.21,62.64 180 top
R38  4.7K  [0603-RES]  61.21,61.06 180 top
R39  10K  [0603-RES]  68.83,68.83 180 top
R40  4.7K  [0603-RES]  84.58,62.64 180 top
R41  4.7K  [0603-RES]  84.58,61.06 180 top
R42  10K  [0603-RES]  92.2,68.83 180 top
R43  4.7K  [0603-RES]  107.95,62.64 180 top
R44  4.7K  [0603-RES]  107.95,61.06 180 top
R45  10K  [0603-RES]  115.57,68.83 180 top
R46  4.7K  [0603-RES]  14.48,86.01 180 top
R47  4.7K  [0603-RES]  14.48,84.42 180 top
R48  10K  [0603-RES]  22.1,92.2 180 top
R49  4.7K  [0603-RES]  37.85,86.01 180 top
R50  4.7K  [0603-RES]  37.85,84.42 180 top
R51  10K  [0603-RES]  45.47,92.2 180 top
R52  4.7K  [0603-RES]  61.21,86.01 180 top
R53  4.7K  [0603-RES]  61.21,84.42 180 top
R54  10K  [0603-RES]  68.83,92.2 180 top
R55  4.7K  [0603-RES]  84.58,86.01 180 top
R56  4.7K  [0603-RES]  84.58,84.42 180 top
R57  10K  [0603-RES]  92.2,92.2 180 top
R58  4.7K  [0603-RES]  107.95,86.01 180 top
R59  4.7K  [0603-RES]  107.95,84.42 180 top
R60  10K  [0603-RES]  115.57,92.2 180 top
R61  4.7K  [0603-RES]  14.48,109.38 180 top
R62  4.7K  [0603-RES]  14.48,107.79 180 top
R63  10K  [0603-RES]  22.1,115.57 180 top
R64  4.7K  [0603-RES]  37.85,109.38 180 top
R65  4.7K  [0603-RES]  37.85,107.79 180 top
R66  10K  [0603-RES]  45.47,115.57 180 top
R67  4.7K  [0603-RES]  61.21,109.38 180 top
R68  4.7K  [0603-RES]  61.21,107.79 180 top
R69  10K  [0603-RES]  68.83,115.57 180 top
R70  4.7K  [0603-RES]  84.58,109.38 180 top
R71  4.7K  [0603-RES]  84.58,107.79 180 top
R72  10K  [0603-RES]  92.2,115.57 180 top
R73  4.7K  [0603-RES]  107.95,109.38 180 top
R74  4.7K  [0603-RES]  107.95,107.79 180 top
R75  10K  [0603-RES]  115.57,115.57 180 top
SJ1  [PAD-JUMPER-3-2OF3_NC_BY_PASTE_YES_SILK_FULL_BOX]  24.48,18.29 90 top
SJ2  S_MODE  [PAD-JUMPER-3-3OF3_NC_BY_TRACE_YES_SILK_FULL_BOX]  10.19,18.29 270 bottom
SJ3  JUMPER-PAD-2-NC_BY_TRACE  [PAD-JUMPER-2-NC_BY_TRACE_YES_SILK]  23.37,25.91 180 bottom
SJ4  JUMPER-PAD-2-NC_BY_TRACE  [PAD-JUMPER-2-NC_BY_TRACE_YES_SILK]  20.83,25.91 0 bottom
SJ5  [PAD-JUMPER-3-2OF3_NC_BY_PASTE_YES_SILK_FULL_BOX]  47.85,18.29 90 top
SJ6  S_MODE  [PAD-JUMPER-3-3OF3_NC_BY_TRACE_YES_SILK_FULL_BOX]  33.56,18.29 270 bottom
SJ7  JUMPER-PAD-2-NC_BY_TRACE  [PAD-JUMPER-2-NC_BY_TRACE_YES_SILK]  46.74,25.91 180 bottom
SJ8  JUMPER-PAD-2-NC_BY_TRACE  [PAD-JUMPER-2-NC_BY_TRACE_YES_SILK]  44.2,25.91 0 bottom
SJ9  [PAD-JUMPER-3-2OF3_NC_BY_PASTE_YES_SILK_FULL_BOX]  71.22,18.29 90 top
SJ10  S_MODE  [PAD-JUMPER-3-3OF3_NC_BY_TRACE_YES_SILK_FULL_BOX]  56.93,18.29 270 bottom
SJ11  JUMPER-PAD-2-NC_BY_TRACE  [PAD-JUMPER-2-NC_BY_TRACE_YES_SILK]  70.1,25.91 180 bottom
SJ12  JUMPER-PAD-2-NC_BY_TRACE  [PAD-JUMPER-2-NC_BY_TRACE_YES_SILK]  67.56,25.91 0 bottom
SJ13  [PAD-JUMPER-3-2OF3_NC_BY_PASTE_YES_SILK_FULL_BOX]  94.58,18.29 90 top
SJ14  S_MODE  [PAD-JUMPER-3-3OF3_NC_BY_TRACE_YES_SILK_FULL_BOX]  80.3,18.29 270 bottom
SJ15  JUMPER-PAD-2-NC_BY_TRACE  [PAD-JUMPER-2-NC_BY_TRACE_YES_SILK]  93.47,25.91 180 bottom
SJ16  JUMPER-PAD-2-NC_BY_TRACE  [PAD-JUMPER-2-NC_BY_TRACE_YES_SILK]  90.93,25.91 0 bottom
SJ17  [PAD-JUMPER-3-2OF3_NC_BY_PASTE_YES_SILK_FULL_BOX]  117.95,18.29 90 top
SJ18  S_MODE  [PAD-JUMPER-3-3OF3_NC_BY_TRACE_YES_SILK_FULL_BOX]  103.66,18.29 270 bottom
SJ19  JUMPER-PAD-2-NC_BY_TRACE  [PAD-JUMPER-2-NC_BY_TRACE_YES_SILK]  116.84,25.91 180 bottom
SJ20  JUMPER-PAD-2-NC_BY_TRACE  [PAD-JUMPER-2-NC_BY_TRACE_YES_SILK]  114.3,25.91 0 bottom
SJ21  [PAD-JUMPER-3-2OF3_NC_BY_PASTE_YES_SILK_FULL_BOX]  24.48,41.66 90 top
SJ22  S_MODE  [PAD-JUMPER-3-3OF3_NC_BY_TRACE_YES_SILK_FULL_BOX]  10.19,41.66 270 bottom
SJ23  JUMPER-PAD-2-NC_BY_TRACE  [PAD-JUMPER-2-NC_BY_TRACE_YES_SILK]  23.37,49.28 180 bottom
SJ24  JUMPER-PAD-2-NC_BY_TRACE  [PAD-JUMPER-2-NC_BY_TRACE_YES_SILK]  20.83,49.28 0 bottom
SJ25  [PAD-JUMPER-3-2OF3_NC_BY_PASTE_YES_SILK_FULL_BOX]  47.85,41.66 90 top
SJ26  S_MODE  [PAD-JUMPER-3-3OF3_NC_BY_TRACE_YES_SILK_FULL_BOX]  33.56,41.66 270 bottom
SJ27  JUMPER-PAD-2-NC_BY_TRACE  [PAD-JUMPER-2-NC_BY_TRACE_YES_SILK]  46.74,49.28 180 bottom
SJ28  JUMPER-PAD-2-NC_BY_TRACE  [PAD-JUMPER-2-NC_BY_TRACE_YES_SILK]  44.2,49.28 0 bottom
SJ29  [PAD-JUMPER-3-2OF3_NC_BY_PASTE_YES_SILK_FULL_BOX]  71.22,41.66 90 top
SJ30  S_MODE  [PAD-JUMPER-3-3OF3_NC_BY_TRACE_YES_SILK_FULL_BOX]  56.93,41.66 270 bottom
SJ31  JUMPER-PAD-2-NC_BY_TRACE  [PAD-JUMPER-2-NC_BY_TRACE_YES_SILK]  70.1,49.28 180 bottom
SJ32  JUMPER-PAD-2-NC_BY_TRACE  [PAD-JUMPER-2-NC_BY_TRACE_YES_SILK]  67.56,49.28 0 bottom
SJ33  [PAD-JUMPER-3-2OF3_NC_BY_PASTE_YES_SILK_FULL_BOX]  94.58,41.66 90 top
SJ34  S_MODE  [PAD-JUMPER-3-3OF3_NC_BY_TRACE_YES_SILK_FULL_BOX]  80.3,41.66 270 bottom
SJ35  JUMPER-PAD-2-NC_BY_TRACE  [PAD-JUMPER-2-NC_BY_TRACE_YES_SILK]  93.47,49.28 180 bottom
SJ36  JUMPER-PAD-2-NC_BY_TRACE  [PAD-JUMPER-2-NC_BY_TRACE_YES_SILK]  90.93,49.28 0 bottom
SJ37  [PAD-JUMPER-3-2OF3_NC_BY_PASTE_YES_SILK_FULL_BOX]  117.95,41.66 90 top
SJ38  S_MODE  [PAD-JUMPER-3-3OF3_NC_BY_TRACE_YES_SILK_FULL_BOX]  103.66,41.66 270 bottom
SJ39  JUMPER-PAD-2-NC_BY_TRACE  [PAD-JUMPER-2-NC_BY_TRACE_YES_SILK]  116.84,49.28 180 bottom
SJ40  JUMPER-PAD-2-NC_BY_TRACE  [PAD-JUMPER-2-NC_BY_TRACE_YES_SILK]  114.3,49.28 0 bottom
SJ41  [PAD-JUMPER-3-2OF3_NC_BY_PASTE_YES_SILK_FULL_BOX]  24.48,65.02 90 top
SJ42  S_MODE  [PAD-JUMPER-3-3OF3_NC_BY_TRACE_YES_SILK_FULL_BOX]  10.19,65.02 270 bottom
SJ43  JUMPER-PAD-2-NC_BY_TRACE  [PAD-JUMPER-2-NC_BY_TRACE_YES_SILK]  23.37,72.64 180 bottom
SJ44  JUMPER-PAD-2-NC_BY_TRACE  [PAD-JUMPER-2-NC_BY_TRACE_YES_SILK]  20.83,72.64 0 bottom
SJ45  [PAD-JUMPER-3-2OF3_NC_BY_PASTE_YES_SILK_FULL_BOX]  47.85,65.02 90 top
SJ46  S_MODE  [PAD-JUMPER-3-3OF3_NC_BY_TRACE_YES_SILK_FULL_BOX]  33.56,65.02 270 bottom
SJ47  JUMPER-PAD-2-NC_BY_TRACE  [PAD-JUMPER-2-NC_BY_TRACE_YES_SILK]  46.74,72.64 180 bottom
SJ48  JUMPER-PAD-2-NC_BY_TRACE  [PAD-JUMPER-2-NC_BY_TRACE_YES_SILK]  44.2,72.64 0 bottom
SJ49  [PAD-JUMPER-3-2OF3_NC_BY_PASTE_YES_SILK_FULL_BOX]  71.22,65.02 90 top
SJ50  S_MODE  [PAD-JUMPER-3-3OF3_NC_BY_TRACE_YES_SILK_FULL_BOX]  56.93,65.02 270 bottom
SJ51  JUMPER-PAD-2-NC_BY_TRACE  [PAD-JUMPER-2-NC_BY_TRACE_YES_SILK]  70.1,72.64 180 bottom
SJ52  JUMPER-PAD-2-NC_BY_TRACE  [PAD-JUMPER-2-NC_BY_TRACE_YES_SILK]  67.56,72.64 0 bottom
SJ53  [PAD-JUMPER-3-2OF3_NC_BY_PASTE_YES_SILK_FULL_BOX]  94.58,65.02 90 top
SJ54  S_MODE  [PAD-JUMPER-3-3OF3_NC_BY_TRACE_YES_SILK_FULL_BOX]  80.3,65.02 270 bottom
SJ55  JUMPER-PAD-2-NC_BY_TRACE  [PAD-JUMPER-2-NC_BY_TRACE_YES_SILK]  93.47,72.64 180 bottom
SJ56  JUMPER-PAD-2-NC_BY_TRACE  [PAD-JUMPER-2-NC_BY_TRACE_YES_SILK]  90.93,72.64 0 bottom
SJ57  [PAD-JUMPER-3-2OF3_NC_BY_PASTE_YES_SILK_FULL_BOX]  117.95,65.02 90 top
SJ58  S_MODE  [PAD-JUMPER-3-3OF3_NC_BY_TRACE_YES_SILK_FULL_BOX]  103.66,65.02 270 bottom
SJ59  JUMPER-PAD-2-NC_BY_TRACE  [PAD-JUMPER-2-NC_BY_TRACE_YES_SILK]  116.84,72.64 180 bottom
SJ60  JUMPER-PAD-2-NC_BY_TRACE  [PAD-JUMPER-2-NC_BY_TRACE_YES_SILK]  114.3,72.64 0 bottom
SJ61  [PAD-JUMPER-3-2OF3_NC_BY_PASTE_YES_SILK_FULL_BOX]  24.48,88.39 90 top
SJ62  S_MODE  [PAD-JUMPER-3-3OF3_NC_BY_TRACE_YES_SILK_FULL_BOX]  10.19,88.39 270 bottom
SJ63  JUMPER-PAD-2-NC_BY_TRACE  [PAD-JUMPER-2-NC_BY_TRACE_YES_SILK]  23.37,96.01 180 bottom
SJ64  JUMPER-PAD-2-NC_BY_TRACE  [PAD-JUMPER-2-NC_BY_TRACE_YES_SILK]  20.83,96.01 0 bottom
SJ65  [PAD-JUMPER-3-2OF3_NC_BY_PASTE_YES_SILK_FULL_BOX]  47.85,88.39 90 top
SJ66  S_MODE  [PAD-JUMPER-3-3OF3_NC_BY_TRACE_YES_SILK_FULL_BOX]  33.56,88.39 270 bottom
SJ67  JUMPER-PAD-2-NC_BY_TRACE  [PAD-JUMPER-2-NC_BY_TRACE_YES_SILK]  46.74,96.01 180 bottom
SJ68  JUMPER-PAD-2-NC_BY_TRACE  [PAD-JUMPER-2-NC_BY_TRACE_YES_SILK]  44.2,96.01 0 bottom
SJ69  [PAD-JUMPER-3-2OF3_NC_BY_PASTE_YES_SILK_FULL_BOX]  71.22,88.39 90 top
SJ70  S_MODE  [PAD-JUMPER-3-3OF3_NC_BY_TRACE_YES_SILK_FULL_BOX]  56.93,88.39 270 bottom
SJ71  JUMPER-PAD-2-NC_BY_TRACE  [PAD-JUMPER-2-NC_BY_TRACE_YES_SILK]  70.1,96.01 180 bottom
SJ72  JUMPER-PAD-2-NC_BY_TRACE  [PAD-JUMPER-2-NC_BY_TRACE_YES_SILK]  67.56,96.01 0 bottom
SJ73  [PAD-JUMPER-3-2OF3_NC_BY_PASTE_YES_SILK_FULL_BOX]  94.58,88.39 90 top
SJ74  S_MODE  [PAD-JUMPER-3-3OF3_NC_BY_TRACE_YES_SILK_FULL_BOX]  80.3,88.39 270 bottom
SJ75  JUMPER-PAD-2-NC_BY_TRACE  [PAD-JUMPER-2-NC_BY_TRACE_YES_SILK]  93.47,96.01 180 bottom
SJ76  JUMPER-PAD-2-NC_BY_TRACE  [PAD-JUMPER-2-NC_BY_TRACE_YES_SILK]  90.93,96.01 0 bottom
SJ77  [PAD-JUMPER-3-2OF3_NC_BY_PASTE_YES_SILK_FULL_BOX]  117.95,88.39 90 top
SJ78  S_MODE  [PAD-JUMPER-3-3OF3_NC_BY_TRACE_YES_SILK_FULL_BOX]  103.66,88.39 270 bottom
SJ79  JUMPER-PAD-2-NC_BY_TRACE  [PAD-JUMPER-2-NC_BY_TRACE_YES_SILK]  116.84,96.01 180 bottom
SJ80  JUMPER-PAD-2-NC_BY_TRACE  [PAD-JUMPER-2-NC_BY_TRACE_YES_SILK]  114.3,96.01 0 bottom
SJ81  [PAD-JUMPER-3-2OF3_NC_BY_PASTE_YES_SILK_FULL_BOX]  24.48,111.76 90 top
SJ82  S_MODE  [PAD-JUMPER-3-3OF3_NC_BY_TRACE_YES_SILK_FULL_BOX]  10.19,111.76 270 bottom
SJ83  JUMPER-PAD-2-NC_BY_TRACE  [PAD-JUMPER-2-NC_BY_TRACE_YES_SILK]  23.37,119.38 180 bottom
SJ84  JUMPER-PAD-2-NC_BY_TRACE  [PAD-JUMPER-2-NC_BY_TRACE_YES_SILK]  20.83,119.38 0 bottom
SJ85  [PAD-JUMPER-3-2OF3_NC_BY_PASTE_YES_SILK_FULL_BOX]  47.85,111.76 90 top
SJ86  S_MODE  [PAD-JUMPER-3-3OF3_NC_BY_TRACE_YES_SILK_FULL_BOX]  33.56,111.76 270 bottom
SJ87  JUMPER-PAD-2-NC_BY_TRACE  [PAD-JUMPER-2-NC_BY_TRACE_YES_SILK]  46.74,119.38 180 bottom
SJ88  JUMPER-PAD-2-NC_BY_TRACE  [PAD-JUMPER-2-NC_BY_TRACE_YES_SILK]  44.2,119.38 0 bottom
SJ89  [PAD-JUMPER-3-2OF3_NC_BY_PASTE_YES_SILK_FULL_BOX]  71.22,111.76 90 top
SJ90  S_MODE  [PAD-JUMPER-3-3OF3_NC_BY_TRACE_YES_SILK_FULL_BOX]  56.93,111.76 270 bottom
SJ91  JUMPER-PAD-2-NC_BY_TRACE  [PAD-JUMPER-2-NC_BY_TRACE_YES_SILK]  70.1,119.38 180 bottom
SJ92  JUMPER-PAD-2-NC_BY_TRACE  [PAD-JUMPER-2-NC_BY_TRACE_YES_SILK]  67.56,119.38 0 bottom
SJ93  [PAD-JUMPER-3-2OF3_NC_BY_PASTE_YES_SILK_FULL_BOX]  94.58,111.76 90 top
SJ94  S_MODE  [PAD-JUMPER-3-3OF3_NC_BY_TRACE_YES_SILK_FULL_BOX]  80.3,111.76 270 bottom
SJ95  JUMPER-PAD-2-NC_BY_TRACE  [PAD-JUMPER-2-NC_BY_TRACE_YES_SILK]  93.47,119.38 180 bottom
SJ96  JUMPER-PAD-2-NC_BY_TRACE  [PAD-JUMPER-2-NC_BY_TRACE_YES_SILK]  90.93,119.38 0 bottom
SJ97  [PAD-JUMPER-3-2OF3_NC_BY_PASTE_YES_SILK_FULL_BOX]  117.95,111.76 90 top
SJ98  S_MODE  [PAD-JUMPER-3-3OF3_NC_BY_TRACE_YES_SILK_FULL_BOX]  103.66,111.76 270 bottom
SJ99  JUMPER-PAD-2-NC_BY_TRACE  [PAD-JUMPER-2-NC_BY_TRACE_YES_SILK]  116.84,119.38 180 bottom
SJ100  JUMPER-PAD-2-NC_BY_TRACE  [PAD-JUMPER-2-NC_BY_TRACE_YES_SILK]  114.3,119.38 0 bottom
STANDOFF1  STAND-OFF  [STAND-OFF]  9.4,23.37 0 top
STANDOFF2  STAND-OFF  [STAND-OFF]  9.4,13.21 0 top
STANDOFF3  STAND-OFF  [STAND-OFF]  27.18,23.37 0 top
STANDOFF4  STAND-OFF  [STAND-OFF]  27.18,13.21 0 top
STANDOFF5  STAND-OFF  [STAND-OFF]  32.77,23.37 0 top
STANDOFF6  STAND-OFF  [STAND-OFF]  32.77,13.21 0 top
STANDOFF7  STAND-OFF  [STAND-OFF]  50.55,23.37 0 top
STANDOFF8  STAND-OFF  [STAND-OFF]  50.55,13.21 0 top
STANDOFF9  STAND-OFF  [STAND-OFF]  56.13,23.37 0 top
STANDOFF10  STAND-OFF  [STAND-OFF]  56.13,13.21 0 top
STANDOFF11  STAND-OFF  [STAND-OFF]  73.91,23.37 0 top
STANDOFF12  STAND-OFF  [STAND-OFF]  73.91,13.21 0 top
STANDOFF13  STAND-OFF  [STAND-OFF]  79.5,23.37 0 top
STANDOFF14  STAND-OFF  [STAND-OFF]  79.5,13.21 0 top
STANDOFF15  STAND-OFF  [STAND-OFF]  97.28,23.37 0 top
STANDOFF16  STAND-OFF  [STAND-OFF]  97.28,13.21 0 top
STANDOFF17  STAND-OFF  [STAND-OFF]  102.87,23.37 0 top
STANDOFF18  STAND-OFF  [STAND-OFF]  102.87,13.21 0 top
STANDOFF19  STAND-OFF  [STAND-OFF]  120.65,23.37 0 top
STANDOFF20  STAND-OFF  [STAND-OFF]  120.65,13.21 0 top
STANDOFF21  STAND-OFF  [STAND-OFF]  9.4,46.74 0 top
STANDOFF22  STAND-OFF  [STAND-OFF]  9.4,36.58 0 top
STANDOFF23  STAND-OFF  [STAND-OFF]  27.18,46.74 0 top
STANDOFF24  STAND-OFF  [STAND-OFF]  27.18,36.58 0 top
STANDOFF25  STAND-OFF  [STAND-OFF]  32.77,46.74 0 top
STANDOFF26  STAND-OFF  [STAND-OFF]  32.77,36.58 0 top
STANDOFF27  STAND-OFF  [STAND-OFF]  50.55,46.74 0 top
STANDOFF28  STAND-OFF  [STAND-OFF]  50.55,36.58 0 top
STANDOFF29  STAND-OFF  [STAND-OFF]  56.13,46.74 0 top
STANDOFF30  STAND-OFF  [STAND-OFF]  56.13,36.58 0 top
STANDOFF31  STAND-OFF  [STAND-OFF]  73.91,46.74 0 top
STANDOFF32  STAND-OFF  [STAND-OFF]  73.91,36.58 0 top
STANDOFF33  STAND-OFF  [STAND-OFF]  79.5,46.74 0 top
STANDOFF34  STAND-OFF  [STAND-OFF]  79.5,36.58 0 top
STANDOFF35  STAND-OFF  [STAND-OFF]  97.28,46.74 0 top
STANDOFF36  STAND-OFF  [STAND-OFF]  97.28,36.58 0 top
STANDOFF37  STAND-OFF  [STAND-OFF]  102.87,46.74 0 top
STANDOFF38  STAND-OFF  [STAND-OFF]  102.87,36.58 0 top
STANDOFF39  STAND-OFF  [STAND-OFF]  120.65,46.74 0 top
STANDOFF40  STAND-OFF  [STAND-OFF]  120.65,36.58 0 top
STANDOFF41  STAND-OFF  [STAND-OFF]  9.4,70.1 0 top
STANDOFF42  STAND-OFF  [STAND-OFF]  9.4,59.94 0 top
STANDOFF43  STAND-OFF  [STAND-OFF]  27.18,70.1 0 top
STANDOFF44  STAND-OFF  [STAND-OFF]  27.18,59.94 0 top
STANDOFF45  STAND-OFF  [STAND-OFF]  32.77,70.1 0 top
STANDOFF46  STAND-OFF  [STAND-OFF]  32.77,59.94 0 top
STANDOFF47  STAND-OFF  [STAND-OFF]  50.55,70.1 0 top
STANDOFF48  STAND-OFF  [STAND-OFF]  50.55,59.94 0 top
STANDOFF49  STAND-OFF  [STAND-OFF]  56.13,70.1 0 top
STANDOFF50  STAND-OFF  [STAND-OFF]  56.13,59.94 0 top
STANDOFF51  STAND-OFF  [STAND-OFF]  73.91,70.1 0 top
STANDOFF52  STAND-OFF  [STAND-OFF]  73.91,59.94 0 top
STANDOFF53  STAND-OFF  [STAND-OFF]  79.5,70.1 0 top
STANDOFF54  STAND-OFF  [STAND-OFF]  79.5,59.94 0 top
STANDOFF55  STAND-OFF  [STAND-OFF]  97.28,70.1 0 top
STANDOFF56  STAND-OFF  [STAND-OFF]  97.28,59.94 0 top
STANDOFF57  STAND-OFF  [STAND-OFF]  102.87,70.1 0 top
STANDOFF58  STAND-OFF  [STAND-OFF]  102.87,59.94 0 top
STANDOFF59  STAND-OFF  [STAND-OFF]  120.65,70.1 0 top
STANDOFF60  STAND-OFF  [STAND-OFF]  120.65,59.94 0 top
STANDOFF61  STAND-OFF  [STAND-OFF]  9.4,93.47 0 top
STANDOFF62  STAND-OFF  [STAND-OFF]  9.4,83.31 0 top
STANDOFF63  STAND-OFF  [STAND-OFF]  27.18,93.47 0 top
STANDOFF64  STAND-OFF  [STAND-OFF]  27.18,83.31 0 top
STANDOFF65  STAND-OFF  [STAND-OFF]  32.77,93.47 0 top
STANDOFF66  STAND-OFF  [STAND-OFF]  32.77,83.31 0 top
STANDOFF67  STAND-OFF  [STAND-OFF]  50.55,93.47 0 top
STANDOFF68  STAND-OFF  [STAND-OFF]  50.55,83.31 0 top
STANDOFF69  STAND-OFF  [STAND-OFF]  56.13,93.47 0 top
STANDOFF70  STAND-OFF  [STAND-OFF]  56.13,83.31 0 top
STANDOFF71  STAND-OFF  [STAND-OFF]  73.91,93.47 0 top
STANDOFF72  STAND-OFF  [STAND-OFF]  73.91,83.31 0 top
STANDOFF73  STAND-OFF  [STAND-OFF]  79.5,93.47 0 top
STANDOFF74  STAND-OFF  [STAND-OFF]  79.5,83.31 0 top
STANDOFF75  STAND-OFF  [STAND-OFF]  97.28,93.47 0 top
STANDOFF76  STAND-OFF  [STAND-OFF]  97.28,83.31 0 top
STANDOFF77  STAND-OFF  [STAND-OFF]  102.87,93.47 0 top
STANDOFF78  STAND-OFF  [STAND-OFF]  102.87,83.31 0 top
STANDOFF79  STAND-OFF  [STAND-OFF]  120.65,93.47 0 top
STANDOFF80  STAND-OFF  [STAND-OFF]  120.65,83.31 0 top
STANDOFF81  STAND-OFF  [STAND-OFF]  9.4,116.84 0 top
STANDOFF82  STAND-OFF  [STAND-OFF]  9.4,106.68 0 top
STANDOFF83  STAND-OFF  [STAND-OFF]  27.18,116.84 0 top
STANDOFF84  STAND-OFF  [STAND-OFF]  27.18,106.68 0 top
STANDOFF85  STAND-OFF  [STAND-OFF]  32.77,116.84 0 top
STANDOFF86  STAND-OFF  [STAND-OFF]  32.77,106.68 0 top
STANDOFF87  STAND-OFF  [STAND-OFF]  50.55,116.84 0 top
STANDOFF88  STAND-OFF  [STAND-OFF]  50.55,106.68 0 top
STANDOFF89  STAND-OFF  [STAND-OFF]  56.13,116.84 0 top
STANDOFF90  STAND-OFF  [STAND-OFF]  56.13,106.68 0 top
STANDOFF91  STAND-OFF  [STAND-OFF]  73.91,116.84 0 top
STANDOFF92  STAND-OFF  [STAND-OFF]  73.91,106.68 0 top
STANDOFF93  STAND-OFF  [STAND-OFF]  79.5,116.84 0 top
STANDOFF94  STAND-OFF  [STAND-OFF]  79.5,106.68 0 top
STANDOFF95  STAND-OFF  [STAND-OFF]  97.28,116.84 0 top
STANDOFF96  STAND-OFF  [STAND-OFF]  97.28,106.68 0 top
STANDOFF97  STAND-OFF  [STAND-OFF]  102.87,116.84 0 top
STANDOFF98  STAND-OFF  [STAND-OFF]  102.87,106.68 0 top
STANDOFF99  STAND-OFF  [STAND-OFF]  120.65,116.84 0 top
STANDOFF100  STAND-OFF  [STAND-OFF]  120.65,106.68 0 top
U1  LSM6DS3  [LGA14L_DOT_INDICATOR]  41.66,18.29 180 top
U2  LSM6DS3  [LGA14L_DOT_INDICATOR]  18.29,18.29 180 top
U3  LSM6DS3  [LGA14L_DOT_INDICATOR]  65.02,18.29 180 top
U4  LSM6DS3  [LGA14L_DOT_INDICATOR]  88.39,18.29 180 top
U5  LSM6DS3  [LGA14L_DOT_INDICATOR]  111.76,18.29 180 top
U6  LSM6DS3  [LGA14L_DOT_INDICATOR]  18.29,41.66 180 top
U7  LSM6DS3  [LGA14L_DOT_INDICATOR]  41.66,41.66 180 top
U8  LSM6DS3  [LGA14L_DOT_INDICATOR]  65.02,41.66 180 top
U9  LSM6DS3  [LGA14L_DOT_INDICATOR]  88.39,41.66 180 top
U10  LSM6DS3  [LGA14L_DOT_INDICATOR]  111.76,41.66 180 top
U11  LSM6DS3  [LGA14L_DOT_INDICATOR]  18.29,65.02 180 top
U12  LSM6DS3  [LGA14L_DOT_INDICATOR]  41.66,65.02 180 top
U13  LSM6DS3  [LGA14L_DOT_INDICATOR]  65.02,65.02 180 top
U14  LSM6DS3  [LGA14L_DOT_INDICATOR]  88.39,65.02 180 top
U15  LSM6DS3  [LGA14L_DOT_INDICATOR]  111.76,65.02 180 top
U16  LSM6DS3  [LGA14L_DOT_INDICATOR]  18.29,88.39 180 top
U17  LSM6DS3  [LGA14L_DOT_INDICATOR]  41.66,88.39 180 top
U18  LSM6DS3  [LGA14L_DOT_INDICATOR]  65.02,88.39 180 top
U19  LSM6DS3  [LGA14L_DOT_INDICATOR]  88.39,88.39 180 top
U20  LSM6DS3  [LGA14L_DOT_INDICATOR]  111.76,88.39 180 top
U21  LSM6DS3  [LGA14L_DOT_INDICATOR]  18.29,111.76 180 top
U22  LSM6DS3  [LGA14L_DOT_INDICATOR]  41.66,111.76 180 top
U23  LSM6DS3  [LGA14L_DOT_INDICATOR]  65.02,111.76 180 top
U24  LSM6DS3  [LGA14L_DOT_INDICATOR]  88.39,111.76 180 top
U25  LSM6DS3  [LGA14L_DOT_INDICATOR]  111.76,111.76 180 top

## Library data of the parts
C1-C50 = SparkFun-Capacitors; PROD_ID: CAP-08390
E$1 = SparkFun-Retired
E$6 E$7 FID1-FID50 LOGO1-LOGO75 = SparkFun-Aesthetics
JP1-JP100 = SparkFun-Connectors
L1-L25 = SparkFun-Passives; PROD_ID: RES-07859
R1 R2 R4 R5 R7 R8 R10 R11 R13 R14 R16 R17 R19 R20 R22 R23 R25 R26 R28 R29 R31 R32 R34 R35 R37 R38 R40 R41 R43 R44 R46 R47 R49 R50 R52 R53 R55 R56 R58 R59 R61 R62 R64 R65 R67 R68 R70 R71 R73 R74 = SparkFun-Resistors; PROD_ID: RES-07857
R3 R6 R9 R12 R15 R18 R21 R24 R27 R30 R33 R36 R39 R42 R45 R48 R51 R54 R57 R60 R63 R66 R69 R72 R75 = SparkFun-Resistors; PROD_ID: RES-00824
SJ1-SJ100 = SparkFun-Passives
STANDOFF1-STANDOFF100 = SparkFun-Electromechanical
U1-U25 = LSM6DS3; PROD_ID: IC-12969

## Nets
3.3V: C4.1 JP1.5 JP2.1 L1.1 R3.2 SJ1.3 SJ2.2 U2.5
3.3V1: C2.1 JP4.5 JP5.1 L2.1 R6.2 SJ5.3 SJ6.2 U1.5
3.3V2: C6.1 JP8.5 JP9.1 L3.1 R9.2 SJ9.3 SJ10.2 U3.5
3.3V3: C8.1 JP13.5 JP14.1 L4.1 R12.2 SJ13.3 SJ14.2 U4.5
3.3V4: C10.1 JP17.5 JP18.1 L5.1 R15.2 SJ17.3 SJ18.2 U5.5
3.3V5: C12.1 JP21.5 JP22.1 L6.1 R18.2 SJ21.3 SJ22.2 U6.5
3.3V6: C14.1 JP25.5 JP26.1 L7.1 R21.2 SJ25.3 SJ26.2 U7.5
3.3V7: C16.1 JP29.5 JP30.1 L8.1 R24.2 SJ29.3 SJ30.2 U8.5
3.3V8: C18.1 JP33.5 JP34.1 L9.1 R27.2 SJ33.3 SJ34.2 U9.5
3.3V9: C20.1 JP37.5 JP38.1 L10.1 R30.2 SJ37.3 SJ38.2 U10.5
3.3V10: C22.1 JP41.5 JP42.1 L11.1 R33.2 SJ41.3 SJ42.2 U11.5
3.3V11: C24.1 JP45.5 JP46.1 L12.1 R36.2 SJ45.3 SJ46.2 U12.5
3.3V12: C26.1 JP49.5 JP50.1 L13.1 R39.2 SJ49.3 SJ50.2 U13.5
3.3V13: C28.1 JP53.5 JP54.1 L14.1 R42.2 SJ53.3 SJ54.2 U14.5
3.3V14: C30.1 JP57.5 JP58.1 L15.1 R45.2 SJ57.3 SJ58.2 U15.5
3.3V15: C32.1 JP61.5 JP62.1 L16.1 R48.2 SJ61.3 SJ62.2 U16.5
3.3V16: C34.1 JP65.5 JP66.1 L17.1 R51.2 SJ65.3 SJ66.2 U17.5
3.3V17: C36.1 JP69.5 JP70.1 L18.1 R54.2 SJ69.3 SJ70.2 U18.5
3.3V18: C38.1 JP73.5 JP74.1 L19.1 R57.2 SJ73.3 SJ74.2 U19.5
3.3V19: C40.1 JP77.5 JP78.1 L20.1 R60.2 SJ77.3 SJ78.2 U20.5
3.3V20: C42.1 JP81.5 JP82.1 L21.1 R63.2 SJ81.3 SJ82.2 U21.5
3.3V21: C44.1 JP85.5 JP86.1 L22.1 R66.2 SJ85.3 SJ86.2 U22.5
3.3V22: C46.1 JP89.5 JP90.1 L23.1 R69.2 SJ89.3 SJ90.2 U23.5
3.3V23: C48.1 JP93.5 JP94.1 L24.1 R72.2 SJ93.3 SJ94.2 U24.5
3.3V24: C50.1 JP97.5 JP98.1 L25.1 R75.2 SJ97.3 SJ98.2 U25.5
CS: JP1.1 R3.1 U2.12
CS1: JP4.1 R6.1 U1.12
CS2: JP8.1 R9.1 U3.12
CS3: JP13.1 R12.1 U4.12
CS4: JP17.1 R15.1 U5.12
CS5: JP21.1 R18.1 U6.12
CS6: JP25.1 R21.1 U7.12
CS7: JP29.1 R24.1 U8.12
CS8: JP33.1 R27.1 U9.12
CS9: JP37.1 R30.1 U10.12
CS10: JP41.1 R33.1 U11.12
CS11: JP45.1 R36.1 U12.12
CS12: JP49.1 R39.1 U13.12
CS13: JP53.1 R42.1 U14.12
CS14: JP57.1 R45.1 U15.12
CS15: JP61.1 R48.1 U16.12
CS16: JP65.1 R51.1 U17.12
CS17: JP69.1 R54.1 U18.12
CS18: JP73.1 R57.1 U19.12
CS19: JP77.1 R60.1 U20.12
CS20: JP81.1 R63.1 U21.12
CS21: JP85.1 R66.1 U22.12
CS22: JP89.1 R69.1 U23.12
CS23: JP93.1 R72.1 U24.12
CS24: JP97.1 R75.1 U25.12
GND: C3.2 C4.2 JP1.6 JP11.1 SJ1.1 SJ3.1 SJ4.1 U2.6 U2.7
GND1: C1.2 C2.2 JP4.6 JP6.1 SJ5.1 SJ7.1 SJ8.1 U1.6 U1.7
GND2: C5.2 C6.2 JP8.6 JP10.1 SJ9.1 SJ11.1 SJ12.1 U3.6 U3.7
GND3: C7.2 C8.2 JP13.6 JP15.1 SJ13.1 SJ15.1 SJ16.1 U4.6 U4.7
GND4: C9.2 C10.2 JP17.6 JP19.1 SJ17.1 SJ19.1 SJ20.1 U5.6 U5.7
GND5: C11.2 C12.2 JP21.6 JP23.1 SJ21.1 SJ23.1 SJ24.1 U6.6 U6.7
GND6: C13.2 C14.2 JP25.6 JP27.1 SJ25.1 SJ27.1 SJ28.1 U7.6 U7.7
GND7: C15.2 C16.2 JP29.6 JP31.1 SJ29.1 SJ31.1 SJ32.1 U8.6 U8.7
GND8: C17.2 C18.2 JP33.6 JP35.1 SJ33.1 SJ35.1 SJ36.1 U9.6 U9.7
GND9: C19.2 C20.2 JP37.6 JP39.1 SJ37.1 SJ39.1 SJ40.1 U10.6 U10.7
GND10: C21.2 C22.2 JP41.6 JP43.1 SJ41.1 SJ43.1 SJ44.1 U11.6 U11.7
GND11: C23.2 C24.2 JP45.6 JP47.1 SJ45.1 SJ47.1 SJ48.1 U12.6 U12.7
GND12: C25.2 C26.2 JP49.6 JP51.1 SJ49.1 SJ51.1 SJ52.1 U13.6 U13.7
GND13: C27.2 C28.2 JP53.6 JP55.1 SJ53.1 SJ55.1 SJ56.1 U14.6 U14.7
GND14: C29.2 C30.2 JP57.6 JP59.1 SJ57.1 SJ59.1 SJ60.1 U15.6 U15.7
GND15: C31.2 C32.2 JP61.6 JP63.1 SJ61.1 SJ63.1 SJ64.1 U16.6 U16.7
GND16: C33.2 C34.2 JP65.6 JP67.1 SJ65.1 SJ67.1 SJ68.1 U17.6 U17.7
GND17: C35.2 C36.2 JP69.6 JP71.1 SJ69.1 SJ71.1 SJ72.1 U18.6 U18.7
GND18: C37.2 C38.2 JP73.6 JP75.1 SJ73.1 SJ75.1 SJ76.1 U19.6 U19.7
GND19: C39.2 C40.2 JP77.6 JP79.1 SJ77.1 SJ79.1 SJ80.1 U20.6 U20.7
GND20: C41.2 C42.2 JP81.6 JP83.1 SJ81.1 SJ83.1 SJ84.1 U21.6 U21.7
GND21: C43.2 C44.2 JP85.6 JP87.1 SJ85.1 SJ87.1 SJ88.1 U22.6 U22.7
GND22: C45.2 C46.2 JP89.6 JP91.1 SJ89.1 SJ91.1 SJ92.1 U23.6 U23.7
GND23: C47.2 C48.2 JP93.6 JP95.1 SJ93.1 SJ95.1 SJ96.1 U24.6 U24.7
GND24: C49.2 C50.2 JP97.6 JP99.1 SJ97.1 SJ99.1 SJ100.1 U25.6 U25.7
INT1: JP3.2 U2.4
INT2: JP3.1 U2.9
INT3: JP7.2 U1.4
INT4: JP7.1 U1.9
INT5: JP12.2 U3.4
INT6: JP12.1 U3.9
INT7: JP16.2 U4.4
INT8: JP16.1 U4.9
INT9: JP20.2 U5.4
INT10: JP20.1 U5.9
INT11: JP24.2 U6.4
INT12: JP24.1 U6.9
INT13: JP28.2 U7.4
INT14: JP28.1 U7.9
INT15: JP32.2 U8.4
INT16: JP32.1 U8.9
INT17: JP36.2 U9.4
INT18: JP36.1 U9.9
INT19: JP40.2 U10.4
INT20: JP40.1 U10.9
INT21: JP44.2 U11.4
INT22: JP44.1 U11.9
INT23: JP48.2 U12.4
INT24: JP48.1 U12.9
INT25: JP52.2 U13.4
INT26: JP52.1 U13.9
INT27: JP56.2 U14.4
INT28: JP56.1 U14.9
INT29: JP60.2 U15.4
INT30: JP60.1 U15.9
INT31: JP64.2 U16.4
INT32: JP64.1 U16.9
INT33: JP68.2 U17.4
INT34: JP68.1 U17.9
INT35: JP72.2 U18.4
INT36: JP72.1 U18.9
INT37: JP76.2 U19.4
INT38: JP76.1 U19.9
INT39: JP80.2 U20.4
INT40: JP80.1 U20.9
INT41: JP84.2 U21.4
INT42: JP84.1 U21.9
INT43: JP88.2 U22.4
INT44: JP88.1 U22.9
INT45: JP92.2 U23.4
INT46: JP92.1 U23.9
INT47: JP96.2 U24.4
INT48: JP96.1 U24.9
INT49: JP100.2 U25.4
INT50: JP100.1 U25.9
N$1: R4.2 SJ6.1
N$2: R5.2 SJ6.3
N$3: R7.2 SJ10.1
N$4: R8.2 SJ10.3
N$5: R1.2 SJ2.1
N$6: R2.2 SJ2.3
N$7: R10.2 SJ14.1
N$8: R11.2 SJ14.3
N$9: R13.2 SJ18.1
N$10: R14.2 SJ18.3
N$11: R16.2 SJ22.1
N$12: R17.2 SJ22.3
N$13: R19.2 SJ26.1
N$14: R20.2 SJ26.3
N$15: R22.2 SJ30.1
N$16: R23.2 SJ30.3
N$17: R25.2 SJ34.1
N$18: R26.2 SJ34.3
N$19: R28.2 SJ38.1
N$20: R29.2 SJ38.3
N$21: R31.2 SJ42.1
N$22: R32.2 SJ42.3
N$23: R34.2 SJ46.1
N$24: R35.2 SJ46.3
N$25: R37.2 SJ50.1
N$26: R38.2 SJ50.3
N$27: R40.2 SJ54.1
N$28: R41.2 SJ54.3
N$29: R43.2 SJ58.1
N$30: R44.2 SJ58.3
N$31: R46.2 SJ62.1
N$32: R47.2 SJ62.3
N$33: R49.2 SJ66.1
N$34: R50.2 SJ66.3
N$35: R52.2 SJ70.1
N$36: R53.2 SJ70.3
N$37: R55.2 SJ74.1
N$38: R56.2 SJ74.3
N$39: R58.2 SJ78.1
N$40: R59.2 SJ78.3
N$41: R61.2 SJ82.1
N$42: R62.2 SJ82.3
N$43: R64.2 SJ86.1
N$44: R65.2 SJ86.3
N$45: R67.2 SJ90.1
N$46: R68.2 SJ90.3
N$47: R70.2 SJ94.1
N$48: R71.2 SJ94.3
N$49: R73.2 SJ98.1
N$50: R74.2 SJ98.3
OCS: JP3.3 U2.10
OCS1: JP7.3 U1.10
OCS2: JP12.3 U3.10
OCS3: JP16.3 U4.10
OCS4: JP20.3 U5.10
OCS5: JP24.3 U6.10
OCS6: JP28.3 U7.10
OCS7: JP32.3 U8.10
OCS8: JP36.3 U9.10
OCS9: JP40.3 U10.10
OCS10: JP44.3 U11.10
OCS11: JP48.3 U12.10
OCS12: JP52.3 U13.10
OCS13: JP56.3 U14.10
OCS14: JP60.3 U15.10
OCS15: JP64.3 U16.10
OCS16: JP68.3 U17.10
OCS17: JP72.3 U18.10
OCS18: JP76.3 U19.10
OCS19: JP80.3 U20.10
OCS20: JP84.3 U21.10
OCS21: JP88.3 U22.10
OCS22: JP92.3 U23.10
OCS23: JP96.3 U24.10
OCS24: JP100.3 U25.10
SCL: JP1.3 R1.1 U2.13
SCL1: JP4.3 R4.1 U1.13
SCL2: JP8.3 R7.1 U3.13
SCL3: JP13.3 R10.1 U4.13
SCL4: JP17.3 R13.1 U5.13
SCL5: JP21.3 R16.1 U6.13
SCL6: JP25.3 R19.1 U7.13
SCL7: JP29.3 R22.1 U8.13
SCL8: JP33.3 R25.1 U9.13
SCL9: JP37.3 R28.1 U10.13
SCL10: JP41.3 R31.1 U11.13
SCL11: JP45.3 R34.1 U12.13
SCL12: JP49.3 R37.1 U13.13
SCL13: JP53.3 R40.1 U14.13
SCL14: JP57.3 R43.1 U15.13
SCL15: JP61.3 R46.1 U16.13
SCL16: JP65.3 R49.1 U17.13
SCL17: JP69.3 R52.1 U18.13
SCL18: JP73.3 R55.1 U19.13
SCL19: JP77.3 R58.1 U20.13
SCL20: JP81.3 R61.1 U21.13
SCL21: JP85.3 R64.1 U22.13
SCL22: JP89.3 R67.1 U23.13
SCL23: JP93.3 R70.1 U24.13
SCL24: JP97.3 R73.1 U25.13
SCX: JP3.4 SJ4.2 U2.3
SCX1: JP7.4 SJ8.2 U1.3
SCX2: JP12.4 SJ12.2 U3.3
SCX3: JP16.4 SJ16.2 U4.3
SCX4: JP20.4 SJ20.2 U5.3
SCX5: JP24.4 SJ24.2 U6.3
SCX6: JP28.4 SJ28.2 U7.3
SCX7: JP32.4 SJ32.2 U8.3
SCX8: JP36.4 SJ36.2 U9.3
SCX9: JP40.4 SJ40.2 U10.3
SCX10: JP44.4 SJ44.2 U11.3
SCX11: JP48.4 SJ48.2 U12.3
SCX12: JP52.4 SJ52.2 U13.3
SCX13: JP56.4 SJ56.2 U14.3
SCX14: JP60.4 SJ60.2 U15.3
SCX15: JP64.4 SJ64.2 U16.3
SCX16: JP68.4 SJ68.2 U17.3
SCX17: JP72.4 SJ72.2 U18.3
SCX18: JP76.4 SJ76.2 U19.3
SCX19: JP80.4 SJ80.2 U20.3
SCX20: JP84.4 SJ84.2 U21.3
SCX21: JP88.4 SJ88.2 U22.3
SCX22: JP92.4 SJ92.2 U23.3
SCX23: JP96.4 SJ96.2 U24.3
SCX24: JP100.4 SJ100.2 U25.3
SDA: JP1.4 R2.1 U2.14
SDA1: JP4.4 R5.1 U1.14
SDA2: JP8.4 R8.1 U3.14
SDA3: JP13.4 R11.1 U4.14
SDA4: JP17.4 R14.1 U5.14
SDA5: JP21.4 R17.1 U6.14
SDA6: JP25.4 R20.1 U7.14
SDA7: JP29.4 R23.1 U8.14
SDA8: JP33.4 R26.1 U9.14
SDA9: JP37.4 R29.1 U10.14
SDA10: JP41.4 R32.1 U11.14
SDA11: JP45.4 R35.1 U12.14
SDA12: JP49.4 R38.1 U13.14
SDA13: JP53.4 R41.1 U14.14
SDA14: JP57.4 R44.1 U15.14
SDA15: JP61.4 R47.1 U16.14
SDA16: JP65.4 R50.1 U17.14
SDA17: JP69.4 R53.1 U18.14
SDA18: JP73.4 R56.1 U19.14
SDA19: JP77.4 R59.1 U20.14
SDA20: JP81.4 R62.1 U21.14
SDA21: JP85.4 R65.1 U22.14
SDA22: JP89.4 R68.1 U23.14
SDA23: JP93.4 R71.1 U24.14
SDA24: JP97.4 R74.1 U25.14
SDO/SA0: JP1.2 SJ1.2 U2.1
SDO/SA1: JP4.2 SJ5.2 U1.1
SDO/SA2: JP8.2 SJ9.2 U3.1
SDO/SA3: JP13.2 SJ13.2 U4.1
SDO/SA4: JP17.2 SJ17.2 U5.1
SDO/SA5: JP21.2 SJ21.2 U6.1
SDO/SA6: JP25.2 SJ25.2 U7.1
SDO/SA7: JP29.2 SJ29.2 U8.1
SDO/SA8: JP33.2 SJ33.2 U9.1
SDO/SA9: JP37.2 SJ37.2 U10.1
SDO/SA10: JP41.2 SJ41.2 U11.1
SDO/SA11: JP45.2 SJ45.2 U12.1
SDO/SA12: JP49.2 SJ49.2 U13.1
SDO/SA13: JP53.2 SJ53.2 U14.1
SDO/SA14: JP57.2 SJ57.2 U15.1
SDO/SA15: JP61.2 SJ61.2 U16.1
SDO/SA16: JP65.2 SJ65.2 U17.1
SDO/SA17: JP69.2 SJ69.2 U18.1
SDO/SA18: JP73.2 SJ73.2 U19.1
SDO/SA19: JP77.2 SJ77.2 U20.1
SDO/SA20: JP81.2 SJ81.2 U21.1
SDO/SA21: JP85.2 SJ85.2 U22.1
SDO/SA22: JP89.2 SJ89.2 U23.1
SDO/SA23: JP93.2 SJ93.2 U24.1
SDO/SA24: JP97.2 SJ97.2 U25.1
SDX: JP3.5 SJ3.2 U2.2
SDX1: JP7.5 SJ7.2 U1.2
SDX2: JP12.5 SJ11.2 U3.2
SDX3: JP16.5 SJ15.2 U4.2
SDX4: JP20.5 SJ19.2 U5.2
SDX5: JP24.5 SJ23.2 U6.2
SDX6: JP28.5 SJ27.2 U7.2
SDX7: JP32.5 SJ31.2 U8.2
SDX8: JP36.5 SJ35.2 U9.2
SDX9: JP40.5 SJ39.2 U10.2
SDX10: JP44.5 SJ43.2 U11.2
SDX11: JP48.5 SJ47.2 U12.2
SDX12: JP52.5 SJ51.2 U13.2
SDX13: JP56.5 SJ55.2 U14.2
SDX14: JP60.5 SJ59.2 U15.2
SDX15: JP64.5 SJ63.2 U16.2
SDX16: JP68.5 SJ67.2 U17.2
SDX17: JP72.5 SJ71.2 U18.2
SDX18: JP76.5 SJ75.2 U19.2
SDX19: JP80.5 SJ79.2 U20.2
SDX20: JP84.5 SJ83.2 U21.2
SDX21: JP88.5 SJ87.2 U22.2
SDX22: JP92.5 SJ91.2 U23.2
SDX23: JP96.5 SJ95.2 U24.2
SDX24: JP100.5 SJ99.2 U25.2
VDD: C3.1 L1.2 U2.8
VDD1: C1.1 L2.2 U1.8
VDD2: C5.1 L3.2 U3.8
VDD3: C7.1 L4.2 U4.8
VDD4: C9.1 L5.2 U5.8
VDD5: C11.1 L6.2 U6.8
VDD6: C13.1 L7.2 U7.8
VDD7: C15.1 L8.2 U8.8
VDD8: C17.1 L9.2 U9.8
VDD9: C19.1 L10.2 U10.8
VDD10: C21.1 L11.2 U11.8
VDD11: C23.1 L12.2 U12.8
VDD12: C25.1 L13.2 U13.8
VDD13: C27.1 L14.2 U14.8
VDD14: C29.1 L15.2 U15.8
VDD15: C31.1 L16.2 U16.8
VDD16: C33.1 L17.2 U17.8
VDD17: C35.1 L18.2 U18.8
VDD18: C37.1 L19.2 U19.8
VDD19: C39.1 L20.2 U20.8
VDD20: C41.1 L21.2 U21.8
VDD21: C43.1 L22.2 U22.8
VDD22: C45.1 L23.2 U23.8
VDD23: C47.1 L24.2 U24.8
VDD24: C49.1 L25.2 U25.8

## Tracks (layer width: path | path; a pad name or v marks a point on that pad's centre or on a via)
3.3V  (via drill 0.38)
  Top 0.203: U2.5 18.79,20.06 19.14,20.41 | R3.2 21.08,21.93 21.08,21.08 21.59,20.57 23.53,20.57 24.48,19.62 SJ1.3 | v13.61,23.45 14.99,23.45 15.33,23.11
  Top 0.406: C4.1 R3.2 | JP2.1 JP1.5 | C4.1 19.14,23.15 18.61,23.69 17.02,23.69 17.02,23.77 | 17.02,23.77 v17.02,24.4 | C4.1 19.14,20.41 | L1.1 15.33,23.11 15.91,23.69 16.94,23.69 17.02,23.77
  Bottom 0.203: SJ2.2 10.99,18.29 11.38,18.68 13.05,18.68 13.53,19.16 13.53,19.56 13.92,19.95 13.92,22.57 13.61,22.89 v13.61,23.45
  Bottom 0.406: JP1.5 JP2.1 15.75,15.75 18.29,18.29 18.29,23.05 17.81,23.53 17.26,23.53 17.02,23.77 v17.02,24.4
3.3V1  (via drill 0.38)
  Top 0.203: U1.5 42.16,20.06 42.51,20.41 | R6.2 44.45,21.93 44.45,21.08 44.96,20.57 46.9,20.57 47.85,19.62 SJ5.3 | v36.97,23.45 38.35,23.45 38.7,23.11
  Top 0.406: C2.1 R6.2 | JP5.1 JP4.5 | C2.1 42.51,23.15 41.97,23.69 40.39,23.69 40.39,23.77 | 40.39,23.77 v40.39,24.4 | C2.1 42.51,20.41 | L2.1 38.7,23.11 39.27,23.69 40.31,23.69 40.39,23.77
  Bottom 0.203: SJ6.2 34.35,18.29 34.75,18.68 36.42,18.68 36.89,19.16 36.89,19.56 37.29,19.95 37.29,22.57 36.97,22.89 v36.97,23.45
  Bottom 0.406: JP4.5 JP5.1 39.12,15.75 41.66,18.29 41.66,23.05 41.18,23.53 40.62,23.53 40.39,23.77 v40.39,24.4
3.3V2  (via drill 0.38)
  Top 0.203: U3.5 65.52,20.06 65.87,20.41 | R9.2 67.82,21.93 67.82,21.08 68.33,20.57 70.26,20.57 71.22,19.62 SJ9.3 | v60.34,23.45 61.72,23.45 62.06,23.11
  Top 0.406: C6.1 R9.2 | JP9.1 JP8.5 | C6.1 65.87,23.15 65.34,23.69 63.75,23.69 63.75,23.77 | 63.75,23.77 v63.75,24.4 | C6.1 65.87,20.41 | L3.1 62.06,23.11 62.64,23.69 63.67,23.69 63.75,23.77
  Bottom 0.203: SJ10.2 57.72,18.29 58.12,18.68 59.78,18.68 60.26,19.16 60.26,19.56 60.66,19.95 60.66,22.57 60.34,22.89 v60.34,23.45
  Bottom 0.406: JP8.5 JP9.1 62.48,15.75 65.02,18.29 65.02,23.05 64.55,23.53 63.99,23.53 63.75,23.77 v63.75,24.4
3.3V3  (via drill 0.38)
  Top 0.203: U4.5 88.89,20.06 89.24,20.41 | R12.2 91.19,21.93 91.19,21.08 91.69,20.57 93.63,20.57 94.58,19.62 SJ13.3 | v83.71,23.45 85.09,23.45 85.43,23.11
  Top 0.406: C8.1 R12.2 | JP14.1 JP13.5 | C8.1 89.24,23.15 88.71,23.69 87.12,23.69 87.12,23.77 | 87.12,23.77 v87.12,24.4 | C8.1 89.24,20.41 | L4.1 85.43,23.11 86.01,23.69 87.04,23.69 87.12,23.77
  Bottom 0.203: SJ14.2 81.09,18.29 81.49,18.68 83.15,18.68 83.63,19.16 83.63,19.56 84.03,19.95 84.03,22.57 83.71,22.89 v83.71,23.45
  Bottom 0.406: JP13.5 JP14.1 85.85,15.75 88.39,18.29 88.39,23.05 87.92,23.53 87.36,23.53 87.12,23.77 v87.12,24.4
3.3V4  (via drill 0.38)
  Top 0.203: U5.5 112.26,20.06 112.61,20.41 | R15.2 114.55,21.93 114.55,21.08 115.06,20.57 117,20.57 117.95,19.62 SJ17.3 | v107.08,23.45 108.46,23.45 108.8,23.11